# Altium PCB roverSwitch.PcbDoc (part 1 of 3)
Units mm, origin at the board's own origin, x right, y up, seen from the top; angles counter-clockwise.
Board outline 100 x 80 mm, 4 copper layers (Top Layer, Int1 (GND), Int2 (PWR), Bottom Layer), stack 1.585 mm thick; 262 components, 196 nets, 913 pads, 409 vias.
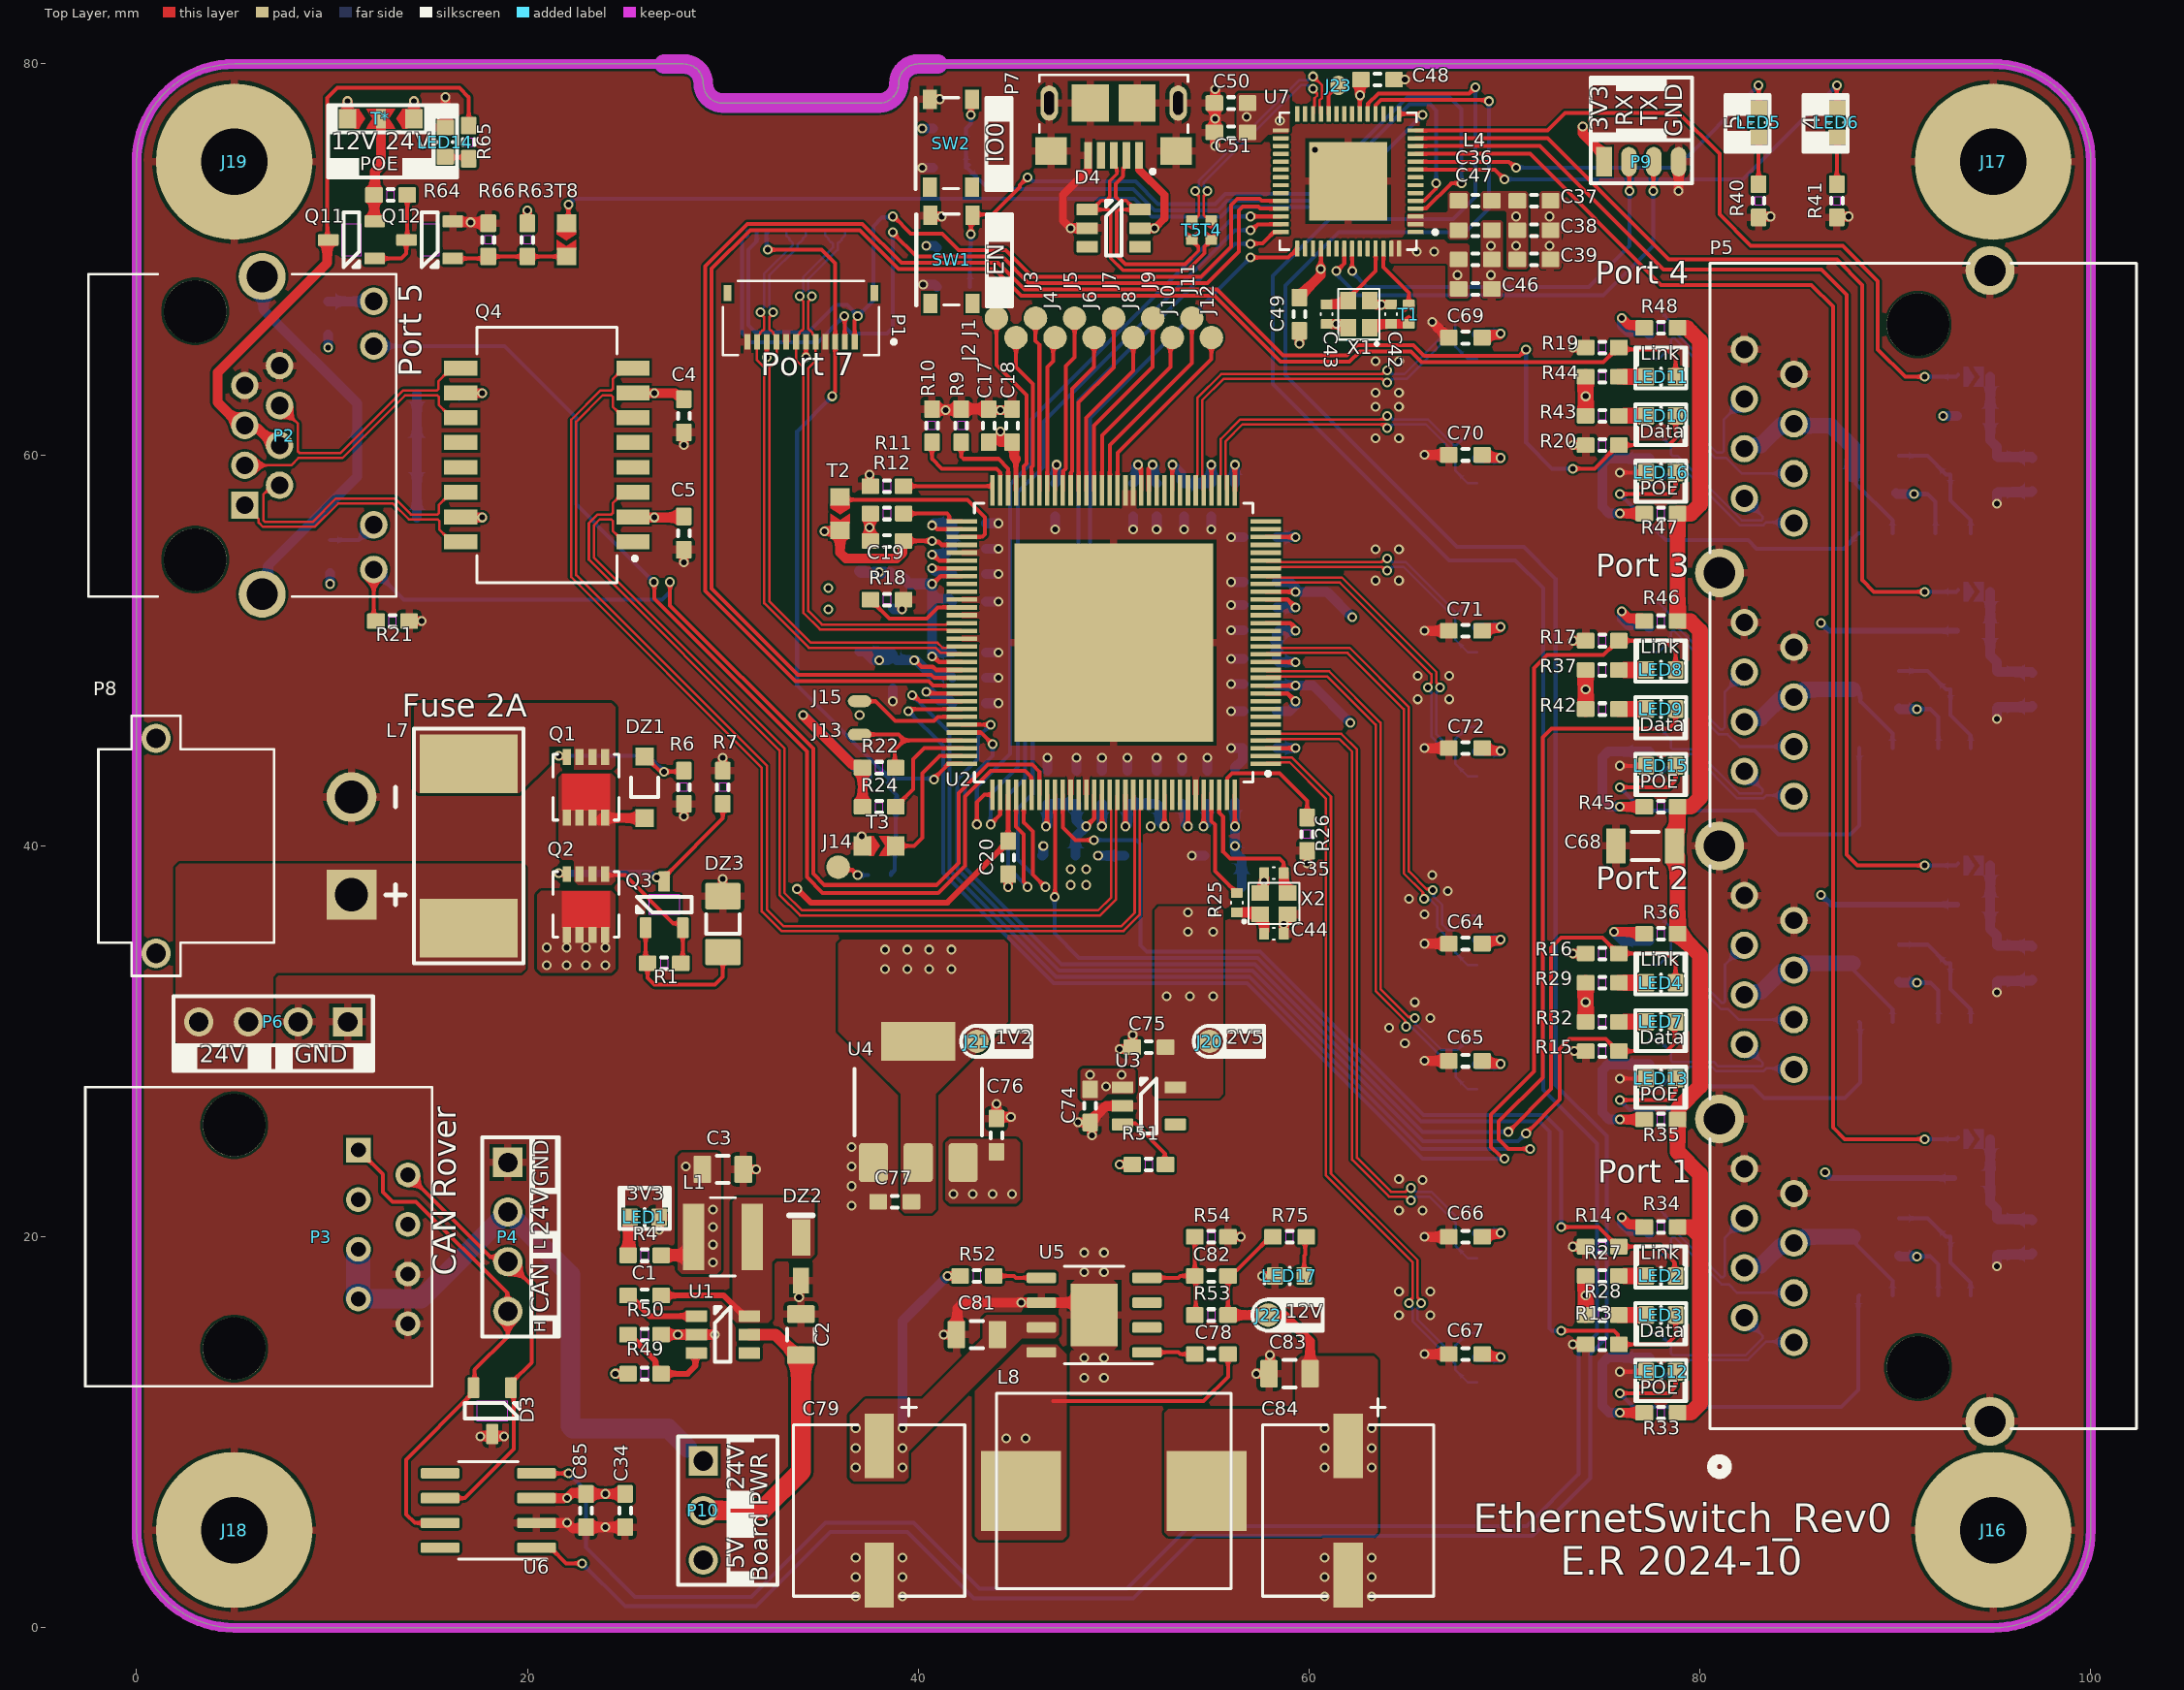
[diagram p0: Top Layer view]
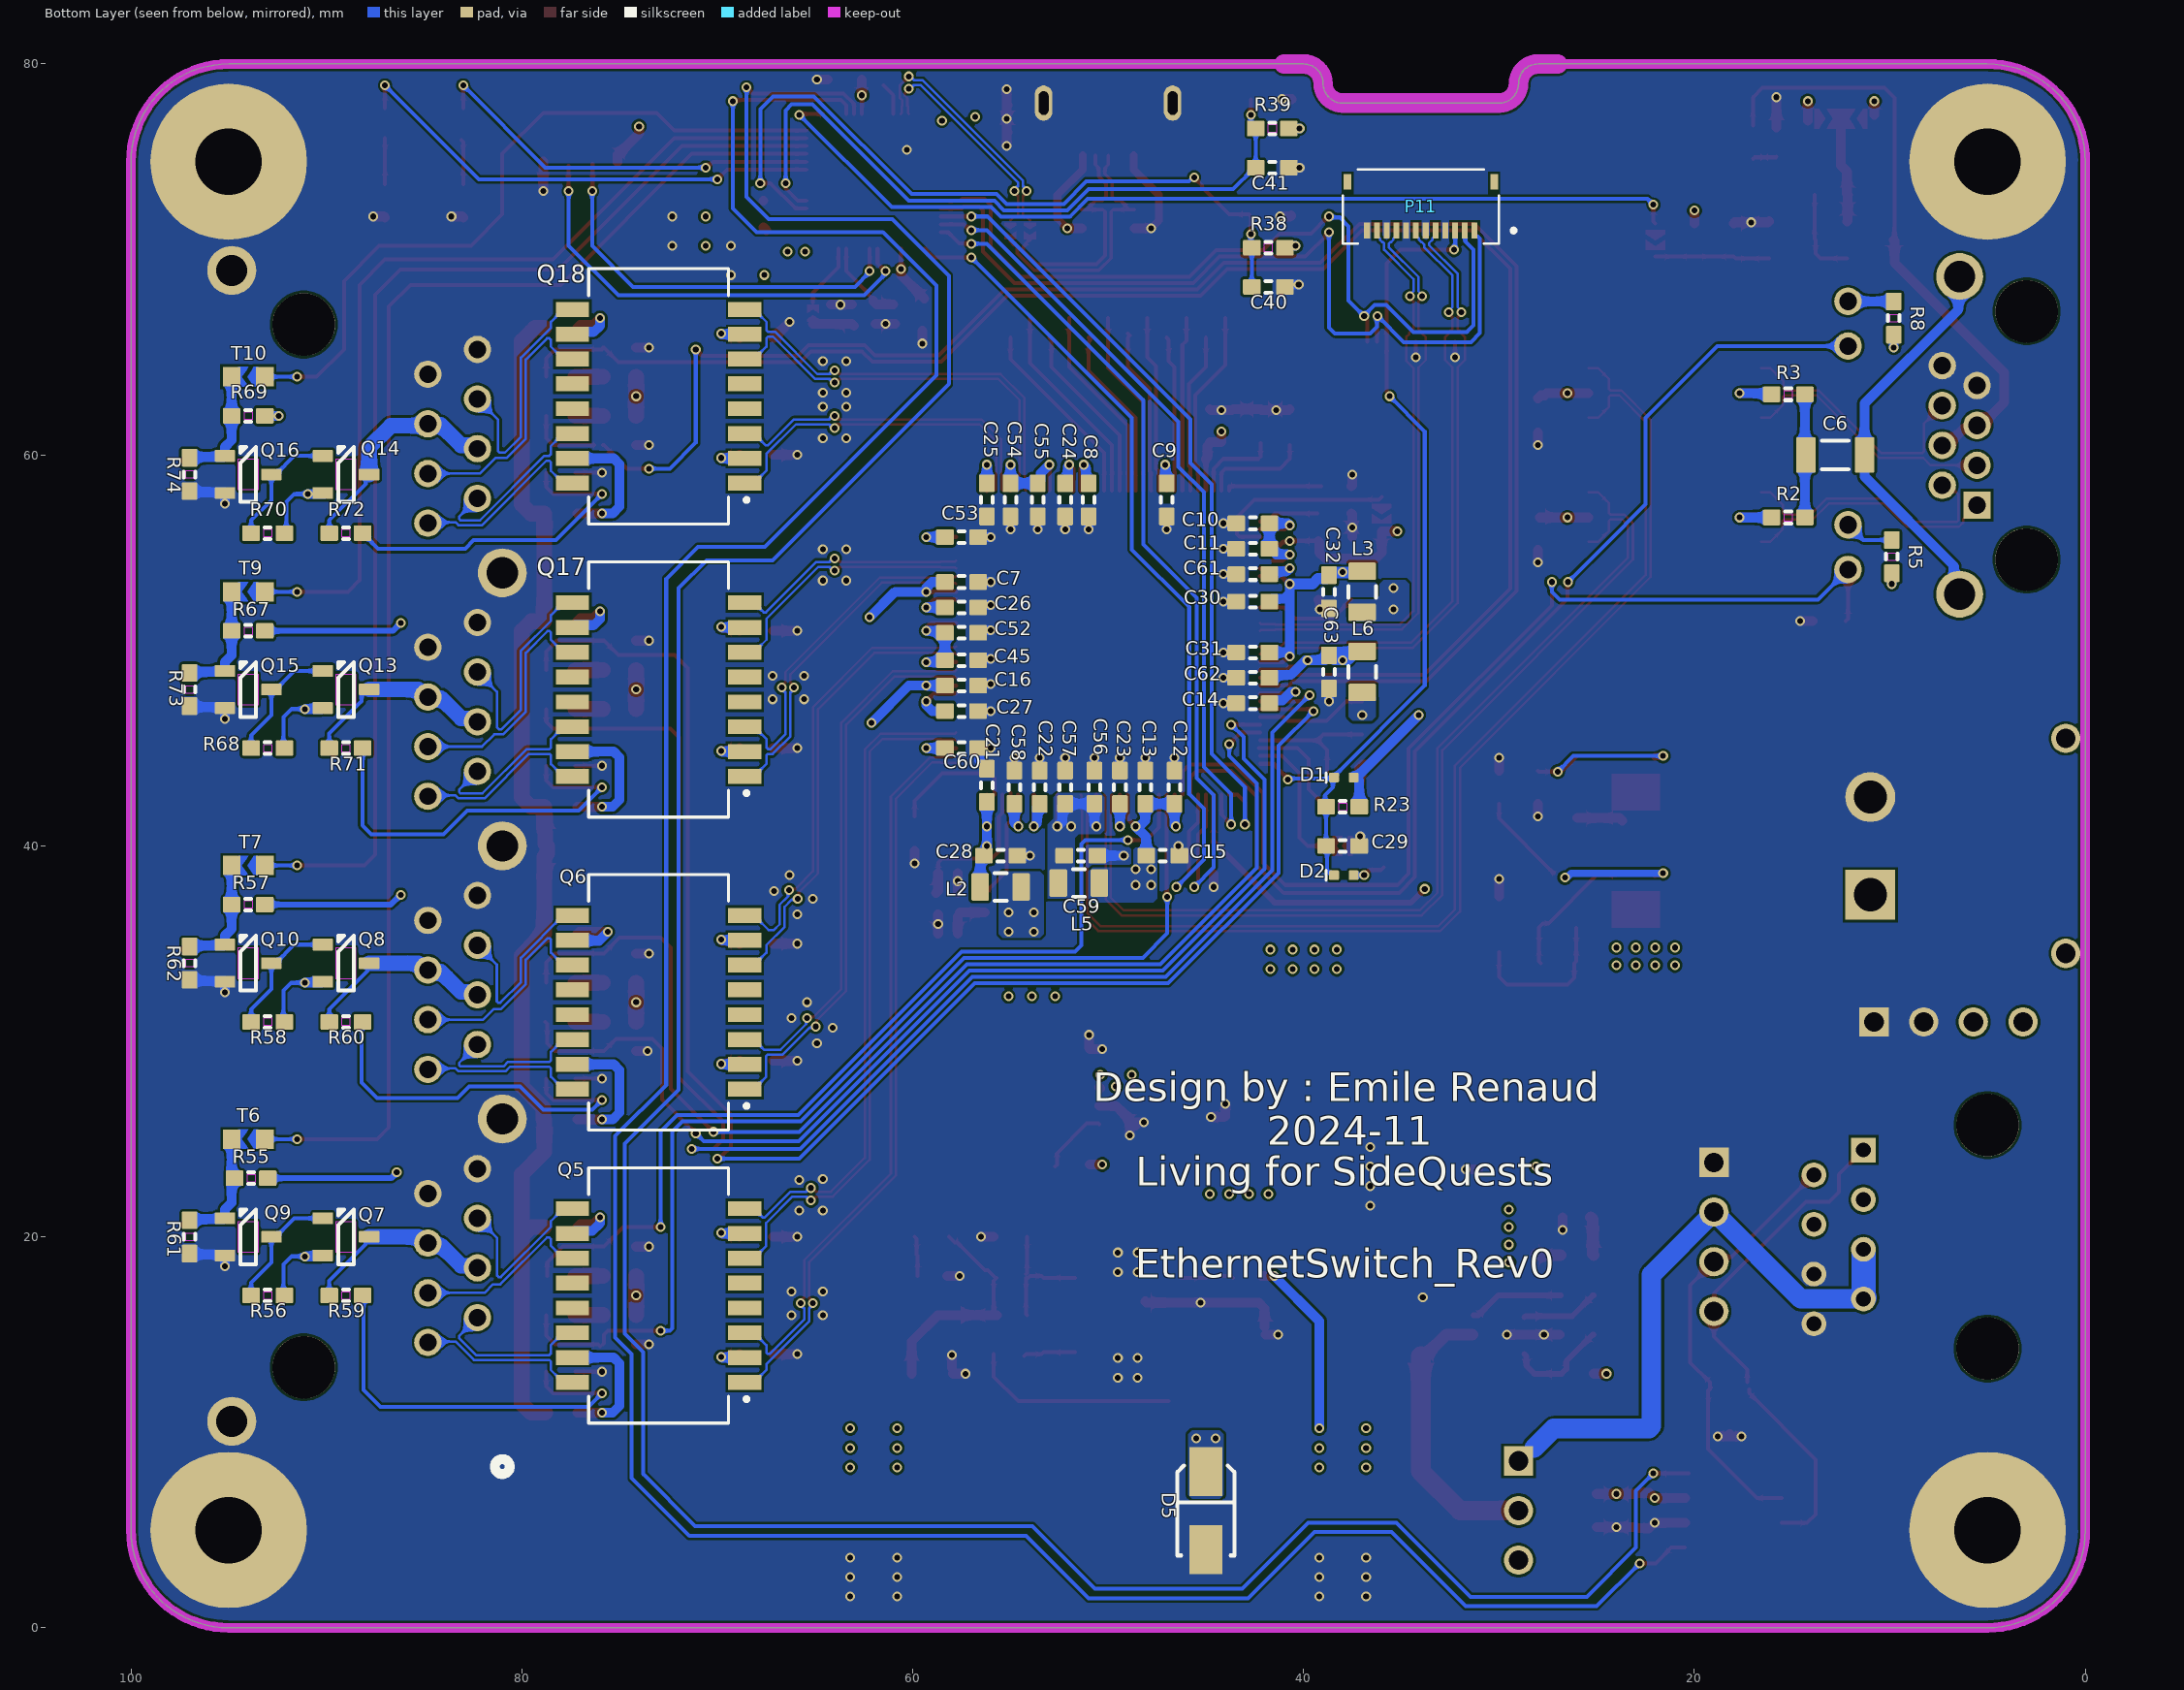
[diagram p1: Bottom Layer view, seen from below]
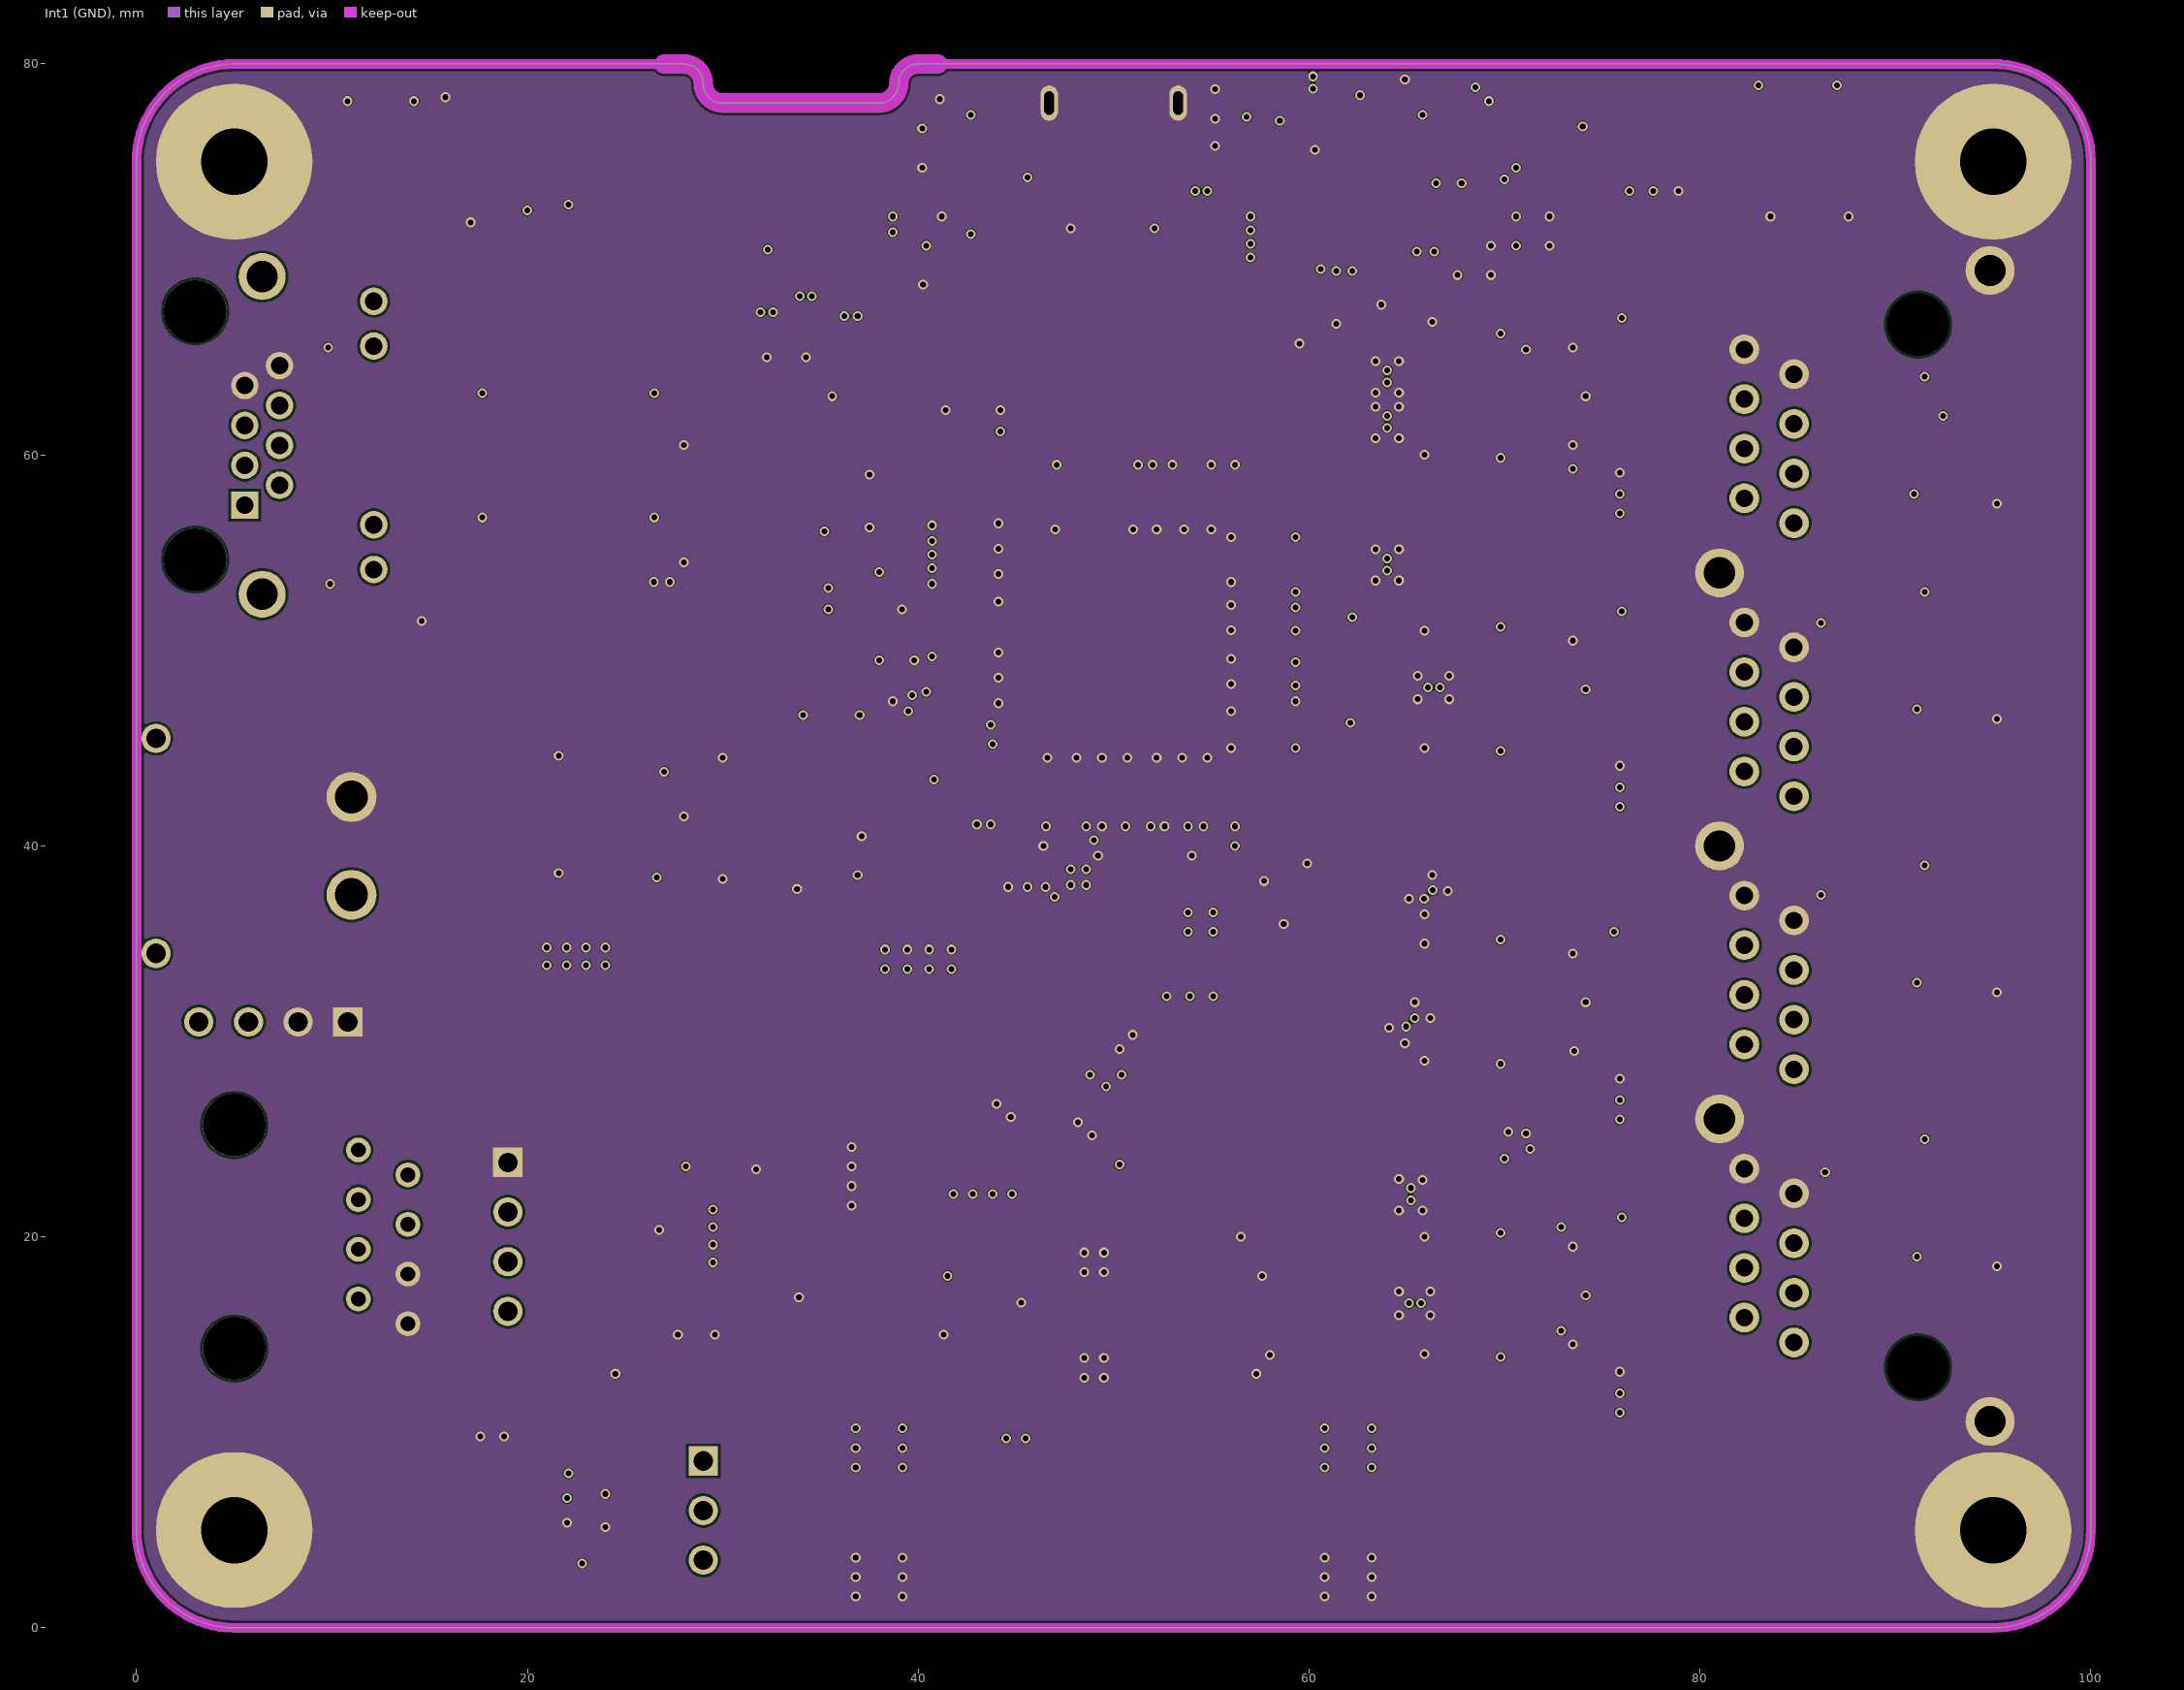
[diagram p2: Int1 (GND)]
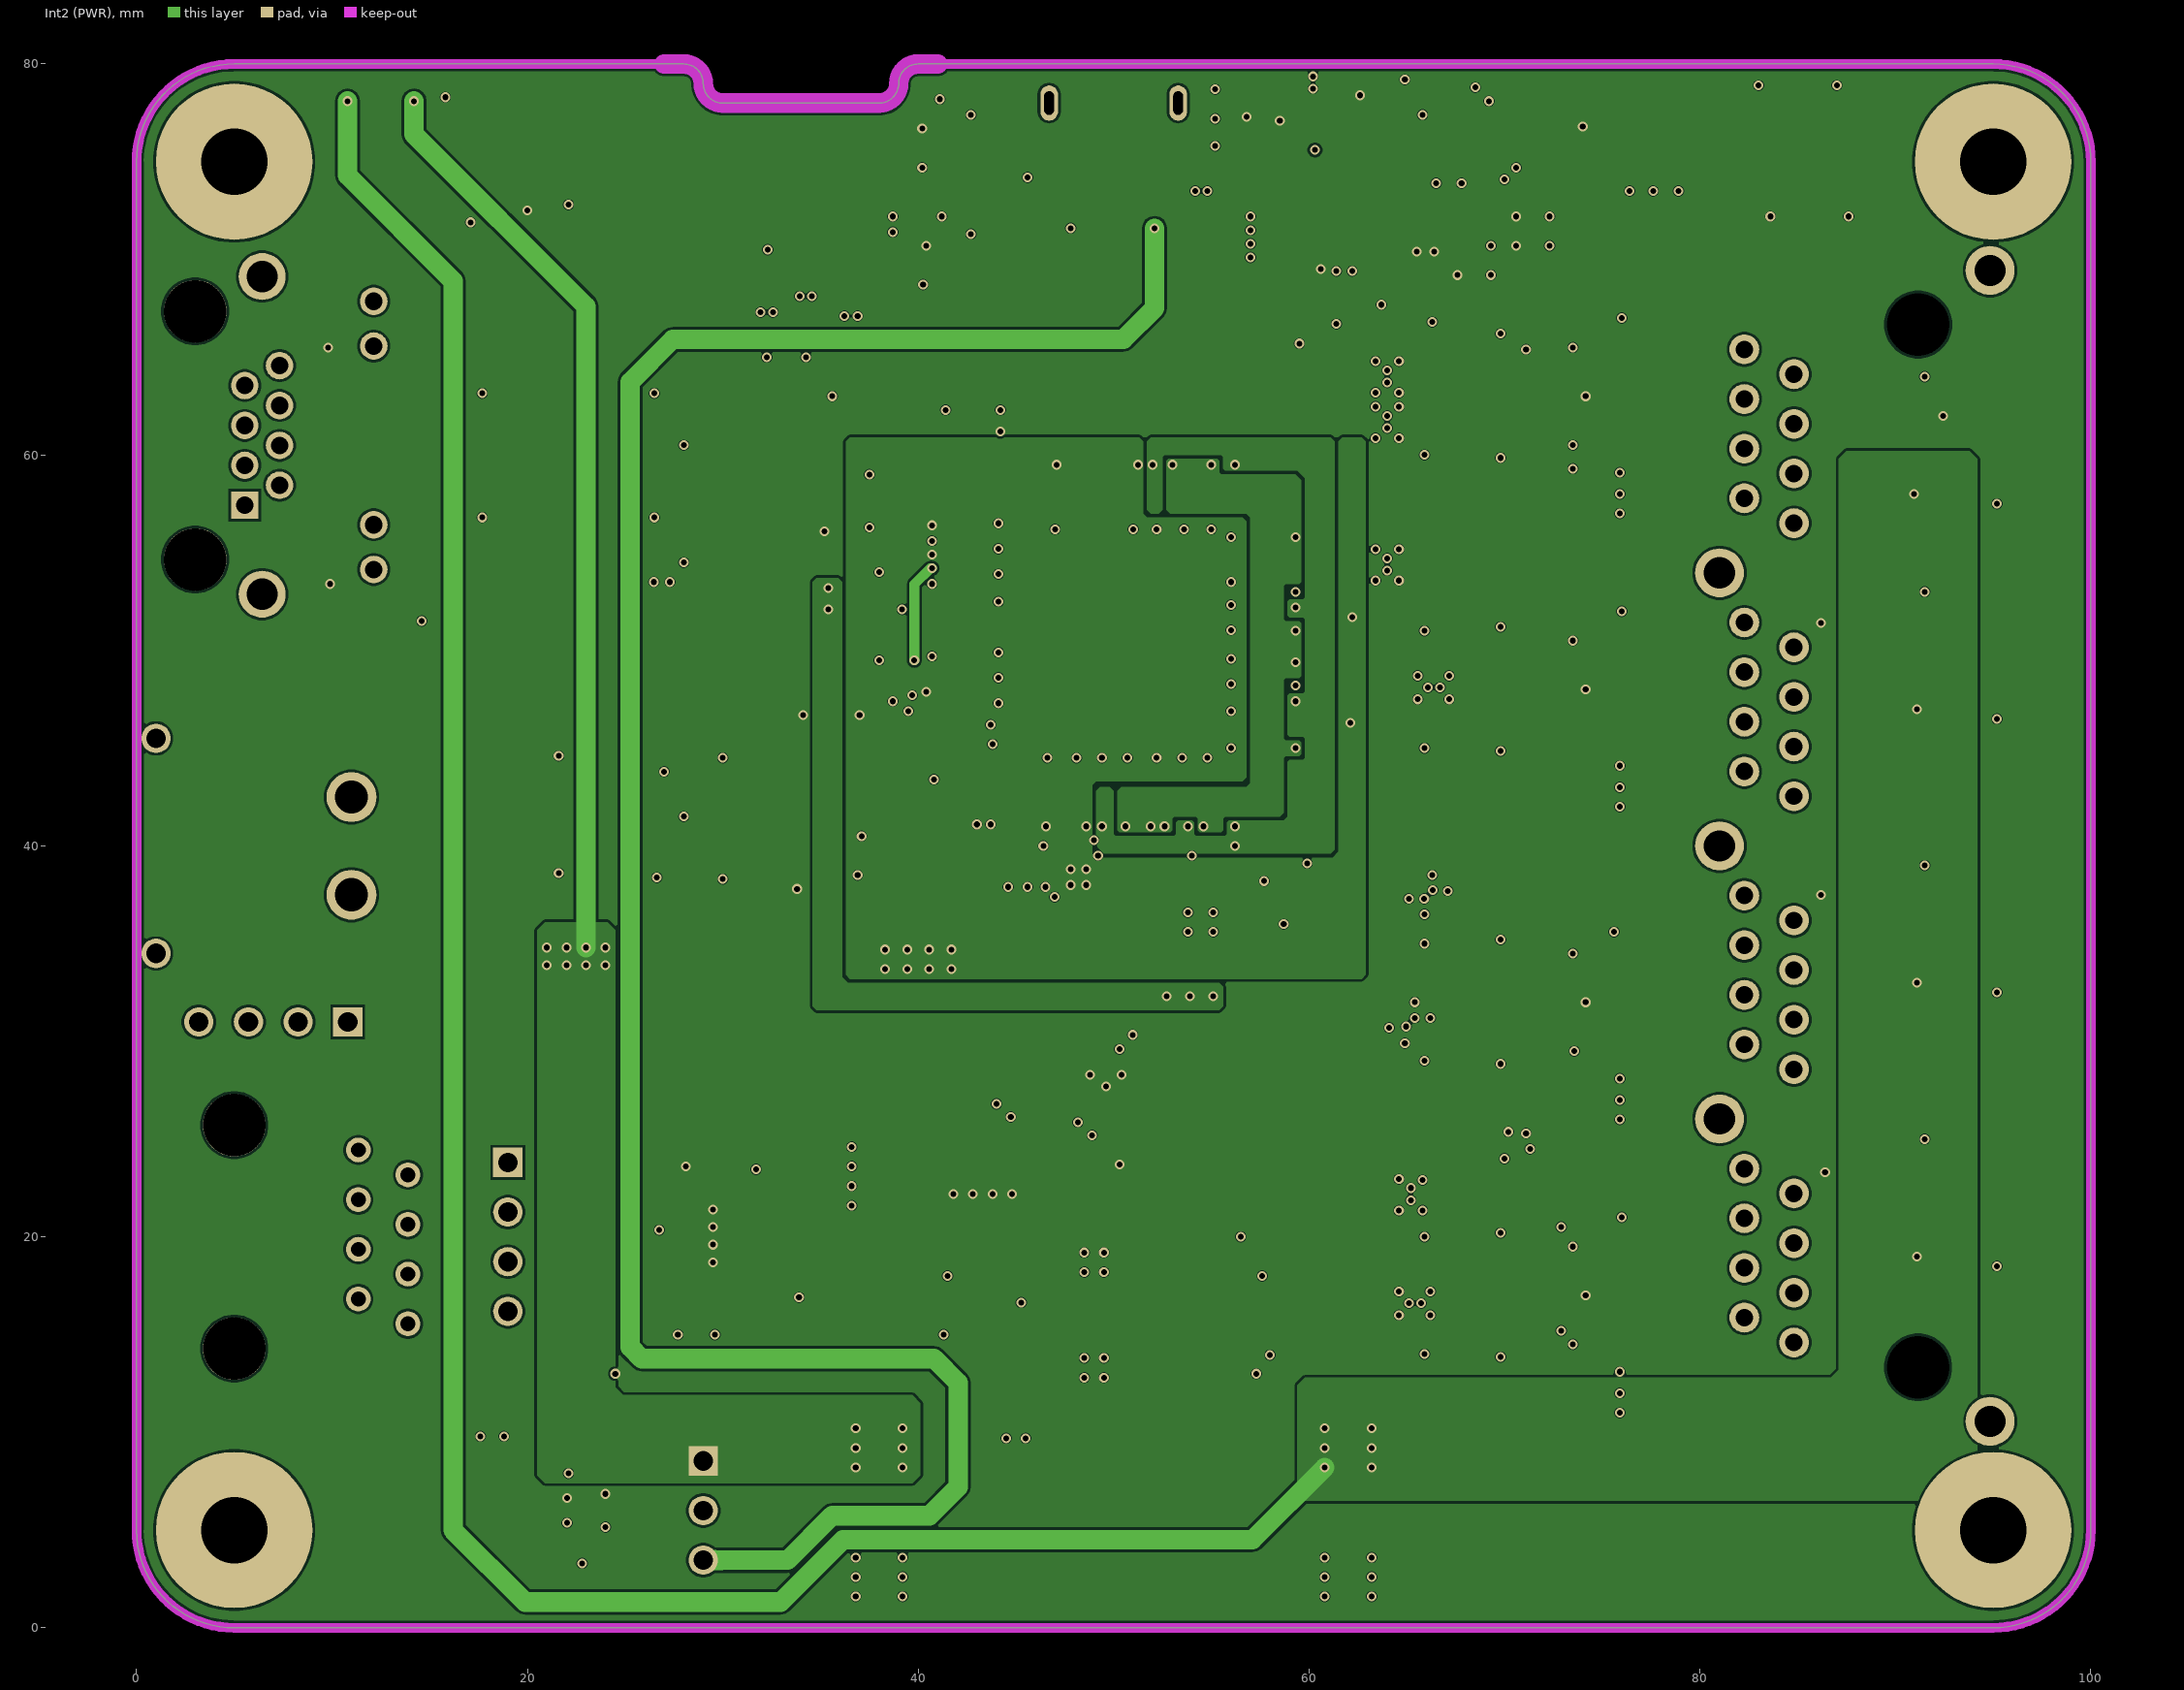
[diagram p3: Int2 (PWR)]
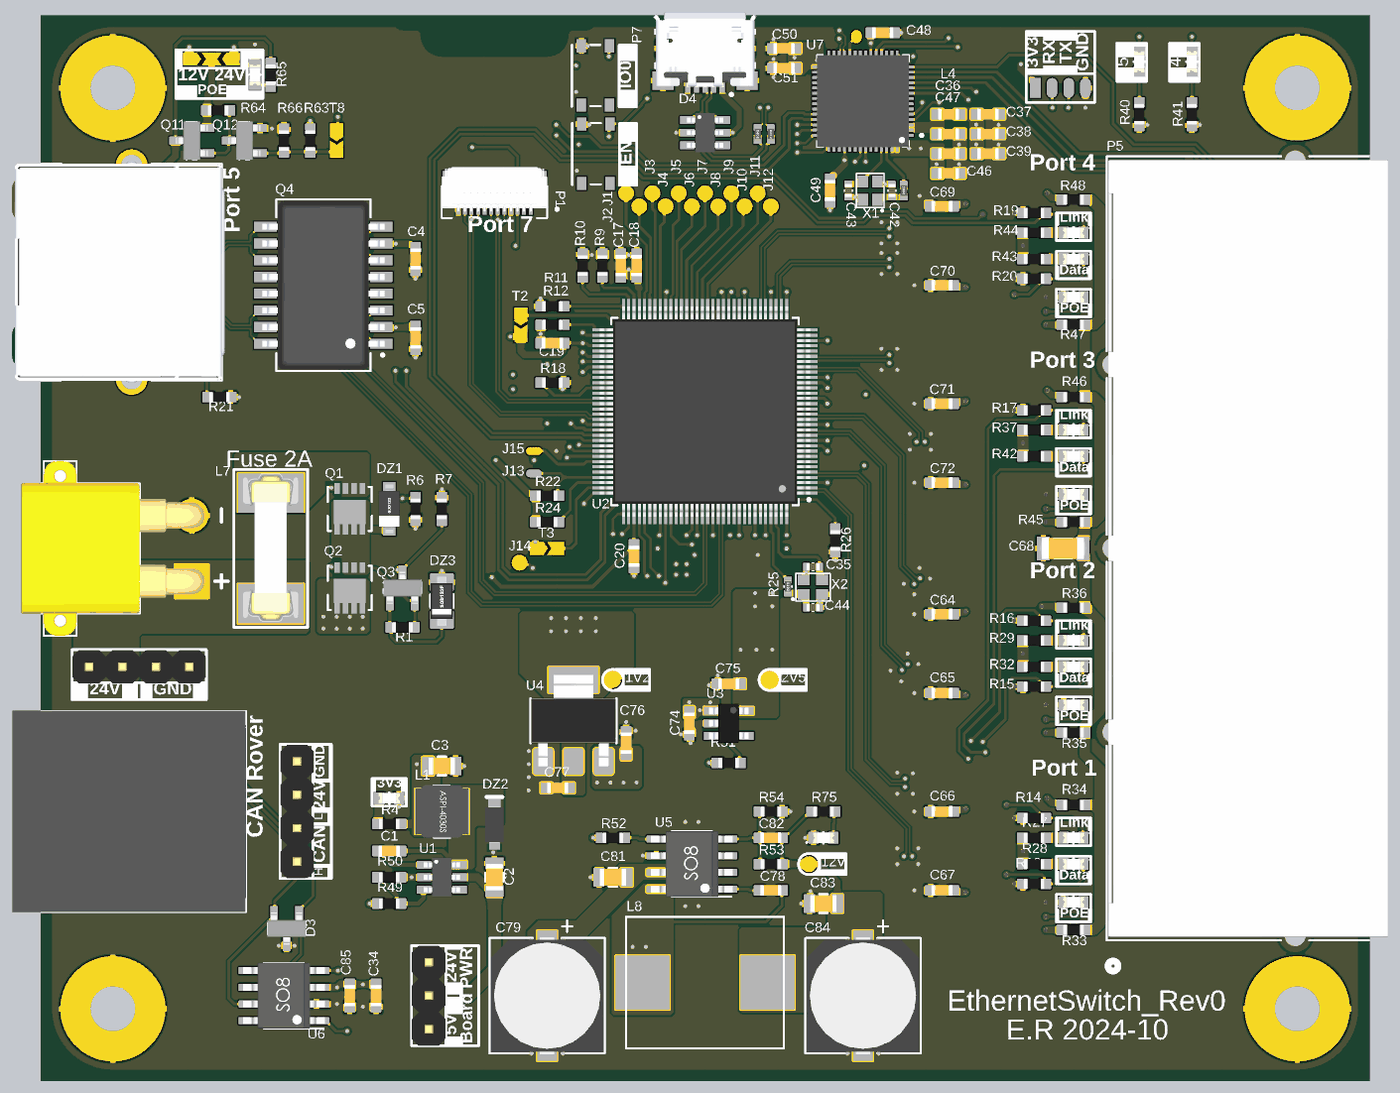
[diagram p6: 3D render of the assembled board from above, using the file's embedded part models]
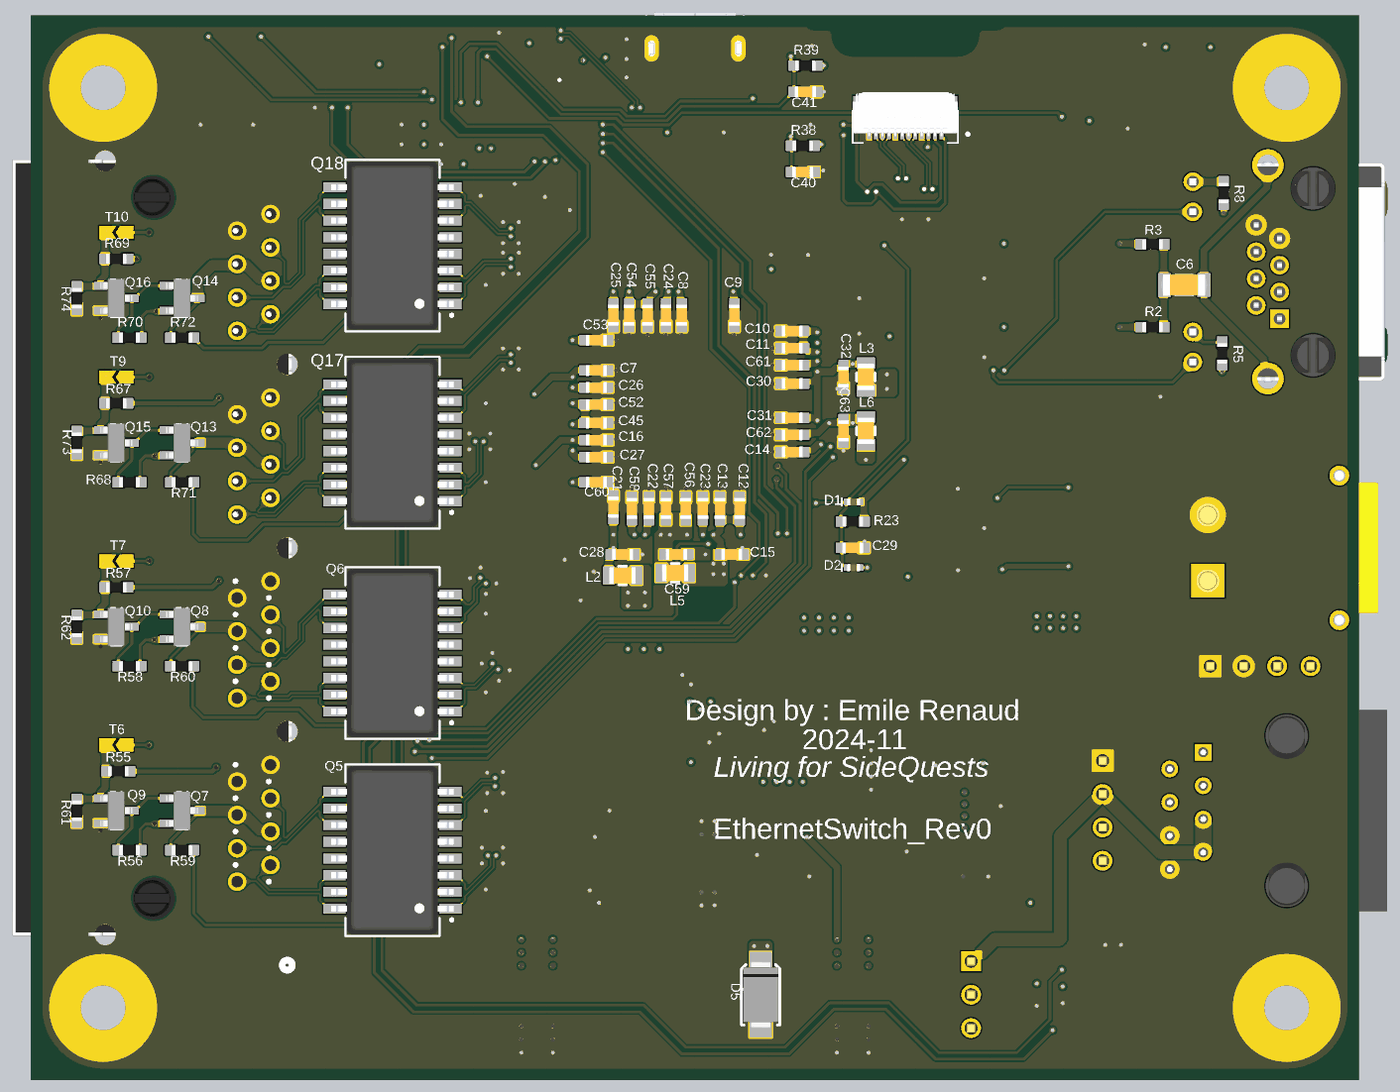
[diagram p7: 3D render of the assembled board from below, using the file's embedded part models]

## Layer stack, top to bottom
Top Solder: solder mask 0.035, SM-001, Dk 4
Top Layer: signal copper 0.035
Dielectric 2: prepreg 0.21, PP-017, Dk 4.6
Int1 (GND): signal copper 0.015
Dielectric 3: core 1.065, Core-039, Dk 4.6
Int2 (PWR): signal copper 0.015
Dielectric 4: prepreg 0.21, PP-017, Dk 4.6
Bottom Layer: signal copper 0.035
Bottom Solder: solder mask 0.035, SM-001, Dk 4

## Board outline
0,5 0,75 cw(c5,75) 5,80 28,80 cw(c28,79) 29,79 ccw(c30,79) 30,78 38,78 ccw(c38,79) 39,79 cw(c40,79) 40,80 95,80 cw(c95,75) 100,75 100,5 cw(c95,5) 95,0 5,0 cw(c5,5)

## Design rules (kind name [scope] priority, off if disabled: settings)
Clearance Clearance_Power [InNetClass('Power')] p1: gap=0.127 ignorepadtopadclearanceinfootprint=FALSE
Clearance Clearance_signal [All] p2: gap=0.125 ignorepadtopadclearanceinfootprint=FALSE
ComponentClearance [All] p1 off: gap=0.254 collisioncheckmode=3 verticalgap=0.254 showdistances=FALSE
DiffPairsRouting eth_100 [Not InDifferentialPair('USB')] p1: maxlimit=0.254 minlimit=0.127 mostfreqgap=0.254 toplayer_maxgap=0.127 toplayer_prefgap=0.127 toplayer_minwidth=0.125 toplayer_maxwidth=0.125 toplayer_prefwidth=0.125 bottomlayer_maxgap=0.127 bottomlayer_prefgap=0.127 bottomlayer_minwidth=0.125 bottomlayer_maxwidth=0.125 bottomlayer_prefwidth=0.125 impedanceprofiledriven=TRUE impedanceprofileid={BED762A8-9934-435E-9BAB-1C0AACEE0ECA} impedanceprofilevalue=100.000000 maxuncoupledlength=12.7
DiffPairsRouting USB_diff [InDifferentialPair('USB') or InDifferentialPair('USB_ESP')] p2: maxlimit=0.254 minlimit=0.127 mostfreqgap=0.254 toplayer_maxgap=0.127 toplayer_prefgap=0.127 toplayer_minwidth=0.182 toplayer_maxwidth=0.182 toplayer_prefwidth=0.182 bottomlayer_maxgap=0.127 bottomlayer_prefgap=0.127 bottomlayer_minwidth=0.182 bottomlayer_maxwidth=0.182 bottomlayer_prefwidth=0.182 impedanceprofiledriven=TRUE impedanceprofileid={FA6609CF-BA32-4F74-B84B-CE5609EF71AF} impedanceprofilevalue=90.000000 maxuncoupledlength=12.7
HoleSize [All] p1 off: absolutevalues=TRUE maxlimit=2.54 minlimit=0.025 maxpercent=80.000 minpercent=20.000
MinimumSolderMaskSliver [All] p1 off: minsoldermaskwidth=0.254
PasteMaskExpansion [All] p1 off: expansion=0
PolygonConnect PolygonConnect_Power [InNetClass('Power')] p1: connectstyle=Direct reliefconductorwidth=0.254 reliefentries=4 polygonreliefangle="90 Angle" airgapwidth=0.254
PolygonConnect PolygonConnectGND [All vs InNet('GND') AND IsNamedPolygon('GND_L01_Plane')] p2: thpad.connectstyle=Relief thpad.reliefconductorwidth=0.4 thpad.reliefentries=4 thpad.polygonreliefangle="90 Angle" thpad.airgapwidth=0.18 smdpad.connectstyle=Relief smdpad.reliefconductorwidth=0.4 smdpad.reliefentries=4 smdpad.polygonreliefangle="90 Angle" smdpad.airgapwidth=0.18 via.connectstyle=Direct via.reliefconductorwidth=0.254 via.reliefentries=4 via.polygonreliefangle="90 Angle" via.airgapwidth=0.254
PolygonConnect [All] p3: connectstyle=Direct reliefconductorwidth=0.254 reliefentries=4 polygonreliefangle="90 Angle" airgapwidth=0.254
RoutingVias [All] p1: holewidth=0.3 width=0.5 viastyle="Through Hole" minholewidth=0.15 minwidth=0.25 maxholewidth=1 maxwidth=1.3
SilkToSolderMaskClearance [IsPad] p1 off: minsilkscreentomaskgap=0.254 clearancetoexposedcopper=TRUE
SolderMaskExpansion [All] p1 off: expansion=0.102 istentingtop=FALSE
SolderMaskExpansion SolderMaskExpansion_1 [All] p2: expansion=0.102 istentingtop=FALSE
SupplyNets "Schematic Supply Nets_13" [InNet('2V5')] p1: voltage=0.000
SupplyNets "Schematic Supply Nets_12" [InNet('3V3')] p2: voltage=0.000
SupplyNets "Schematic Supply Nets_11" [InNet('AVDDH')] p3: voltage=0.000
SupplyNets "Schematic Supply Nets_10" [InNet('1V2')] p4: voltage=0.000
SupplyNets "Schematic Supply Nets_9" [InNet('5V_USB')] p5: voltage=0.000
SupplyNets "Schematic Supply Nets_8" [InNet('GND_RJ45')] p6: voltage=0.000
SupplyNets "Schematic Supply Nets_7" [InNet('12V')] p7: voltage=0.000
SupplyNets "Schematic Supply Nets_6" [InNet('GND')] p8: voltage=0.000
SupplyNets "Schematic Supply Nets_5" [InNet('GND_CH')] p9: voltage=0.000
SupplyNets "Schematic Supply Nets_4" [InNet('VDDHS')] p10: voltage=0.000
SupplyNets "Schematic Supply Nets_3" [InNet('24V')] p11: voltage=0.000
SupplyNets "Schematic Supply Nets_2" [InNet('GND_RJ45_2')] p12: voltage=0.000
SupplyNets "Schematic Supply Nets_1" [InNet('AVDDL')] p13: voltage=0.000
SupplyNets "Schematic Supply Nets" [InNet('VDDLS')] p14: voltage=0.000
Width Width_Power(5A) [InNetClass('Power')] p1: maxlimit=2 minlimit=0.2 preferedwidth=1.25
Width Width_signal [All] p2: maxlimit=1 minlimit=0.1 preferedwidth=0.2 minimp=50.000000 maximp=50.000000 favimp=50.000000
24 further rules are at their usual default settings.

## Classes and differential pairs
differential pair class USB: USB USB_ESP
net class MDI_DIFF100: ETH_RX_1_N ETH_RX_1_P ETH_RX_2_N ETH_RX_2_P ETH_RX_3_N ETH_RX_3_P ETH_RX_4_N ETH_RX_4_P ETH_RX_5_N ETH_RX_5_P ETH_TX_1_N ETH_TX_1_P ETH_TX_2_N ETH_TX_2_P ETH_TX_3_N ETH_TX_3_P ETH_TX_4_N ETH_TX_4_P ETH_TX_5_N ETH_TX_5_P PHY_RX_1_N PHY_RX_1_P PHY_RX_2_N PHY_RX_2_P PHY_RX_3_N PHY_RX_3_P PHY_RX_4_N PHY_RX_4_P PHY_TX_1_N PHY_TX_1_P PHY_TX_2_N PHY_TX_2_P PHY_TX_3_N PHY_TX_3_P PHY_TX_4_N PHY_TX_4_P
component class Power: C1 C2 C3 C74 C75 C76 C77 C78 C79 C81 C82 C83 C84 D5 DZ1 DZ2 DZ3 J20 J21 J22 L1 L7 L8 LED1 LED17 P6 P8 P10 Q1 Q2 Q3 R1 R4 R6 R7 R49 R50 R51 R52 R53 R54 R75 U1 U3 U4 U5
component class KSZ_Switch: J1 J2 J3 J4 J5 J6 J7 J8 J9 J10 J11 J12 R9 R10 R11 R12 R13 R14 R15 R16 R17 R18 R19 R20 R21 U2
component class KSZ_Switch_Control: C7 C8 C9 C10 C11 C12 C13 C14 C15 C16 C17 C18 C19 C20 C21 C22 C23 C24 C25 C26 C27 C28 C29 C30 C31 C32 C35 C44 C45 C52 C53 C54 C55 C56 C57 C58 C59 C60 C61 C62 C63 D1 D2 J13 J14 J15 L2 L3 L5 L6 R22 R23 R24 R25 R26 T2 T3 X2
component class ESP32: C36 C37 C38 C39 C40 C41 C42 C43 C46 C47 C48 C49 C50 C51 D4 J23 L4 LED5 LED6 P7 P9 R38 R39 R40 R41 SW1 SW2 T1 T4 T5 U7 X1
component class Connectors_2: C4 C5 C6 P1 P2 P3 P4 P11 Q4 R2 R3 R5 R8
component class Connectors_1: C64 C65 C66 C67 C68 C69 C70 C71 C72 LED2 LED3 LED4 LED7 LED8 LED9 LED10 LED11 P5 Q5 Q6 Q17 Q18 R27 R28 R29 R32 R33 R34 R35 R36 R37 R42 R43 R44 R45 R46 R47 R48
component class CAN-SW: C34 C85 D3 J16 J17 J18 J19 LED12 LED13 LED14 LED15 LED16 Q7 Q8 Q9 Q10 Q11 Q12 Q13 Q14 Q15 Q16 R55 R56 R57 R58 R59 R60 R61 R62 R63 R64 R65 R66 R67 R68 R69 R70 R71 R72 R73 R74 T6 T7 T8 T9 T10 T* U6
net class Power: 3V3 24V 24V_RAW NetC1_2 NetDZ1_2 NetL7_2
differential pair USB_ESP: +USB_ESP_P -USB_ESP_N
differential pair USB: +USB_P -USB_N
differential pair S_TX_7: +S_TX_7_P -S_TX_7_N
differential pair S_RX_7: +S_RX_7_P -S_RX_7_N
differential pair PHY_TX_5: +PHY_TX_5_P -PHY_TX_5_N
differential pair PHY_TX_4: +PHY_TX_4_P -PHY_TX_4_N
differential pair PHY_TX_3: +PHY_TX_3_P -PHY_TX_3_N
differential pair PHY_TX_2: +PHY_TX_2_P -PHY_TX_2_N
differential pair PHY_TX_1: +PHY_TX_1_P -PHY_TX_1_N
differential pair PHY_RX_5: +PHY_RX_5_P -PHY_RX_5_N
differential pair PHY_RX_4: +PHY_RX_4_P -PHY_RX_4_N
differential pair PHY_RX_3: +PHY_RX_3_P -PHY_RX_3_N
differential pair PHY_RX_2: +PHY_RX_2_P -PHY_RX_2_N
differential pair PHY_RX_1: +PHY_RX_1_P -PHY_RX_1_N
differential pair ETH_TX_5: +ETH_TX_5_P -ETH_TX_5_N
differential pair ETH_TX_4: +ETH_TX_4_P -ETH_TX_4_N
differential pair ETH_TX_3: +ETH_TX_3_P -ETH_TX_3_N
differential pair ETH_TX_2: +ETH_TX_2_P -ETH_TX_2_N
differential pair ETH_TX_1: +ETH_TX_1_P -ETH_TX_1_N
differential pair ETH_RX_5: +ETH_RX_5_P -ETH_RX_5_N
differential pair ETH_RX_4: +ETH_RX_4_P -ETH_RX_4_N
differential pair ETH_RX_3: +ETH_RX_3_P -ETH_RX_3_N
differential pair ETH_RX_2: +ETH_RX_2_P -ETH_RX_2_N
differential pair ETH_RX_1: +ETH_RX_1_P -ETH_RX_1_N

## Components (designator, comment, footprint, x,y, rotation, side; value= is the part's Value field where it differs from the comment)
C1 "Capacitor-0603-10nF-25V-X5R" CAPACITOR-0603 26,17 r0 top value=10nF
C2 "Capacitor-0805-10uF-35V-X5R" CAPACITOR-0805 34,15 r270 top value=10uF
C3 "Capacitor-0805-22uF-16V-X5R" CAPACITOR-0805 30,23.455 r180 top value=22uF
C4 "Capacitor-0603-0.1uF-50V-X7R" CAPACITOR-0603 28,62 r90 top value=0.1uF
C5 "Capacitor-0603-0.1uF-50V-X7R" CAPACITOR-0603 28,56 r90 top value=0.1uF
C6 "Capacitor-1206-1nF-2kV-X7R" CAPACITOR-1206 12.8,60 r180 bottom value=1nF
C7 "Capacitor-0603-0.1uF-50V-X7R" CAPACITOR-0603 57.5,53.5 r0 bottom value=0.1uF
C8 "Capacitor-0603-0.1uF-50V-X7R" CAPACITOR-0603 51,57.7 r90 bottom value=0.1uF
C9 "Capacitor-0603-0.1uF-50V-X7R" CAPACITOR-0603 47,57.7 r90 bottom value=0.1uF
C10 "Capacitor-0603-0.1uF-50V-X7R" CAPACITOR-0603 42.6,56.5 r180 bottom value=0.1uF
C11 "Capacitor-0603-0.1uF-50V-X7R" CAPACITOR-0603 42.6,55.2 r180 bottom value=0.1uF
C12 "Capacitor-0603-0.1uF-50V-X7R" CAPACITOR-0603 46.6,43 r270 bottom value=0.1uF
C13 "Capacitor-0603-0.1uF-50V-X7R" CAPACITOR-0603 48.1,43 r270 bottom value=0.1uF
C14 "Capacitor-0603-0.1uF-50V-X7R" CAPACITOR-0603 42.6,47.3 r180 bottom value=0.1uF
C15 "Capacitor-0603-0.1uF-50V-X7R" CAPACITOR-0603 47.2,39.5 r0 bottom value=0.1uF
C16 "Capacitor-0603-22uF-10V-X5R" CAPACITOR-0603 57.5,48.2 r0 bottom value=22uF
C17 "Capacitor-0603-10uF-10V-X5R" CAPACITOR-0603 43.6,61.5 r270 top value=10uF
C18 "Capacitor-0603-0.1uF-50V-X7R" CAPACITOR-0603 44.8,61.5 r270 top value=0.1uF
C19 "Capacitor-0603-0.1uF-50V-X7R" CAPACITOR-0603 38.4,55.6 r0 top value=0.1uF
C20 "Capacitor-0603-0.1uF-50V-X7R" CAPACITOR-0603 44.6,39.4 r90 top value=0.1uF
C21 "Capacitor-0603-0.1uF-50V-X7R" CAPACITOR-0603 56.2,43.1 r270 bottom value=0.1uF
C22 "Capacitor-0603-0.1uF-50V-X7R" CAPACITOR-0603 53.5,43 r270 bottom value=0.1uF
C23 "Capacitor-0603-0.1uF-50V-X7R" CAPACITOR-0603 49.4,43 r270 bottom value=0.1uF
C24 "Capacitor-0603-0.1uF-50V-X7R" CAPACITOR-0603 52.2,57.7 r90 bottom value=0.1uF
C25 "Capacitor-0603-0.1uF-50V-X7R" CAPACITOR-0603 56.2,57.7 r90 bottom value=0.1uF
C26 "Capacitor-0603-0.1uF-50V-X7R" CAPACITOR-0603 57.5,52.2 r0 bottom value=0.1uF
C27 "Capacitor-0603-0.1uF-50V-X7R" CAPACITOR-0603 57.5,46.9 r0 bottom value=0.1uF
C28 "Capacitor-0603-22uF-10V-X5R" CAPACITOR-0603 55.5,39.5 r0 bottom value=22uF
C29 "Capacitor-0603-10uF-10V-X5R" CAPACITOR-0603 38,40 r0 bottom value=10uF
C30 "Capacitor-0603-22uF-10V-X5R" CAPACITOR-0603 42.6,52.5 r180 bottom value=22uF
C31 "Capacitor-0603-0.1uF-50V-X7R" CAPACITOR-0603 42.6,49.9 r180 bottom value=0.1uF
C32 "Capacitor-0603-0.1uF-50V-X7R" CAPACITOR-0603 38.7,53 r90 bottom value=0.1uF
C34 "Capacitor-0603-0.1uF-50V-X7R" CAPACITOR-0603 25,6 r90 top value=0.1uF
C35 "Capacitor-0402-10pF-50V-C0G" CAPACITOR-0402 58.2,38.6 r0 top value=10pF
C36 "Capacitor-0603-0.1uF-50V-X7R" CAPACITOR-0603 68.5,71.5 r180 top value=0.1uF
C37 "Capacitor-0603-0.1uF-50V-X7R" CAPACITOR-0603 71.5,73 r180 top value=0.1uF
C38 "Capacitor-0603-1uF-25V-X5R" CAPACITOR-0603 71.5,71.5 r180 top value=1uF
C39 "Capacitor-0603-10uF-6.3V-X5R" CAPACITOR-0603 71.5,70 r180 top value=10uF
C40 "Capacitor-0603-1uF-25V-X5R" CAPACITOR-0603 41.8,68.6 r0 bottom value=1uF
C41 "Capacitor-0603-0.1uF-50V-X7R" CAPACITOR-0603 41.6,74.7 r0 bottom value=0.1uF
C42 "Capacitor-0402-10pF-50V-C0G" CAPACITOR-0402 64.2,67.2 r270 top value=10pF
C43 "Capacitor-0402-10pF-50V-C0G" CAPACITOR-0402 60.9,67.2 r90 top value=10pF
C44 "Capacitor-0402-10pF-50V-C0G" CAPACITOR-0402 58.2,35.5 r180 top value=10pF
C45 "Capacitor-0603-0.1uF-50V-X7R" CAPACITOR-0603 57.5,49.5 r0 bottom value=0.1uF
C46 "Capacitor-0603-10nF-25V-X5R" CAPACITOR-0603 68.5,68.5 r180 top value=10nF
C47 "Capacitor-0603-1uF-25V-X5R" CAPACITOR-0603 68.5,70 r180 top value=1uF
C48 "Capacitor-0603-0.1uF-50V-X7R" CAPACITOR-0603 63.5,79.2 r180 top value=0.1uF
C49 "Capacitor-0603-0.1uF-50V-X7R" CAPACITOR-0603 59.5,67.2 r90 top value=0.1uF
C50 "Capacitor-0603-0.1uF-50V-X7R" CAPACITOR-0603 56,78 r0 top value=0.1uF
C51 "Capacitor-0603-1uF-25V-X5R" CAPACITOR-0603 56,76.5 r0 top value=1uF
C52 "Capacitor-0603-0.1uF-50V-X7R" CAPACITOR-0603 57.5,50.9 r0 bottom value=0.1uF
C53 "Capacitor-0603-0.1uF-50V-X7R" CAPACITOR-0603 57.5,55.8 r0 bottom value=0.1uF
C54 "Capacitor-0603-0.1uF-50V-X7R" CAPACITOR-0603 55,57.7 r90 bottom value=0.1uF
C55 "Capacitor-0603-0.1uF-50V-X7R" CAPACITOR-0603 53.6,57.7 r90 bottom value=0.1uF
C56 "Capacitor-0603-0.1uF-50V-X7R" CAPACITOR-0603 50.7,43 r270 bottom value=0.1uF
C57 "Capacitor-0603-0.1uF-50V-X7R" CAPACITOR-0603 52.2,43 r270 bottom value=0.1uF
C58 "Capacitor-0603-0.1uF-50V-X7R" CAPACITOR-0603 54.8,43 r270 bottom value=0.1uF
C59 "Capacitor-0603-0.1uF-50V-X7R" CAPACITOR-0603 51.4,39.5 r0 bottom value=0.1uF
C60 "Capacitor-0603-22uF-10V-X5R" CAPACITOR-0603 57.5,45 r0 bottom value=22uF
C61 "Capacitor-0603-22uF-10V-X5R" CAPACITOR-0603 42.6,53.9 r180 bottom value=22uF
C62 "Capacitor-0603-0.1uF-50V-X7R" CAPACITOR-0603 42.6,48.6 r180 bottom value=0.1uF
C63 "Capacitor-0603-0.1uF-50V-X7R" CAPACITOR-0603 38.7,48.9 r90 bottom value=0.1uF
C64 "Capacitor-0603-0.1uF-50V-X7R" CAPACITOR-0603 68,35 r0 top value=0.1uF
C65 "Capacitor-0603-0.1uF-50V-X7R" CAPACITOR-0603 68,29 r0 top value=0.1uF
C66 "Capacitor-0603-0.1uF-50V-X7R" CAPACITOR-0603 68,20 r0 top value=0.1uF
C67 "Capacitor-0603-0.1uF-50V-X7R" CAPACITOR-0603 68,14 r0 top value=0.1uF
C68 "Capacitor-1206-1nF-2kV-X7R" CAPACITOR-1206 77.2,40 r180 top value=1nF
C69 "Capacitor-0603-0.1uF-50V-X7R" CAPACITOR-0603 68,66 r0 top value=0.1uF
C70 "Capacitor-0603-0.1uF-50V-X7R" CAPACITOR-0603 68,60 r0 top value=0.1uF
C71 "Capacitor-0603-0.1uF-50V-X7R" CAPACITOR-0603 68,51 r0 top value=0.1uF
C72 "Capacitor-0603-0.1uF-50V-X7R" CAPACITOR-0603 68,45 r0 top value=0.1uF
C74 "Capacitor-0603-10uF-10V-X5R" CAPACITOR-0603 48.8,26.7 r270 top value=10uF
C75 "Capacitor-0603-10uF-10V-X5R" CAPACITOR-0603 51.8,29.7 r180 top value=10uF
C76 "Capacitor-0603-1uF-25V-X5R" CAPACITOR-0603 44,25.2 r270 top value=1uF
C77 "Capacitor-0603-1uF-25V-X5R" CAPACITOR-0603 38.8,21.8 r0 top value=1uF
C78 "Capacitor-0603-10nF-50V-X7R" CAPACITOR-0603 55,14 r180 top value=10nF
C79 "CAP ALUM 100UF 20% 25V SMD" CAP_J-V_8X10P5_RUB 38,6 r270 top value=100uF
C81 "Capacitor-0805-22uF-25V-X5R" CAPACITOR-0805 43,15 r0 top value=22uF
C82 "Capacitor-0603-82pF-50V-C0G" CAPACITOR-0603 55,18 r0 top value=82pF
C83 "Capacitor-0805-22uF-25V-X5R" CAPACITOR-0805 59,13 r0 top value=22uF
C84 "CAP ALUM 220UF 20% 35V SMD" CAP_J-V_8X10P5_RUB 62,6 r270 top value=220uF
C85 "Capacitor-0603-10uF-10V-X5R" CAPACITOR-0603 23,6 r90 top value=10uF
D1 "CDBQR0130L" Diode-0402 37.938,43.5 r180 bottom
D2 "CDBQR0130L" Diode-0402 37.938,38.5 r180 bottom
D3 "ESDCAN24-2BLY" SOT-23-3 18.2,11.1 r180 top
D4 "NUP4301MR6T1G" SOT-23-6 50,71.6 r270 top
D5 "CDBA540-HF" SMA/DO-214AC 45,6 r90 bottom
DZ1 "BZT52C6V2-TP" SOD-123 26,43 r270 top
DZ2 "MSS1P3L-M3/89A" DO-219AD 34,19 r270 top
DZ3 "MMSZ5254B-TP" SOD-123F 30,36 r270 top
J1 "hole" PAD-0.53MM#1 44,67 r0 top
J2 "hole" PAD-0.53MM#1 45,66 r0 top
J3 "hole" PAD-0.53MM#1 46,67 r0 top
J4 "hole" PAD-0.53MM#1 47,66 r0 top
J5 "hole" PAD-0.53MM#1 48,67 r0 top
J6 "hole" PAD-0.53MM#1 49,66 r0 top
J7 "hole" PAD-0.53MM#1 50,67 r0 top
J8 "hole" PAD-0.53MM#1 51,66 r0 top
J9 "hole" PAD-0.53MM#1 52,67 r0 top
J10 "hole" PAD-0.53MM#1 53,66 r90 top
J11 "hole" PAD-0.53MM#1 54,67 r0 top
J12 "hole" PAD-0.53MM#1 55,66 r90 top
J13 "hole" PAD-0.53MM#2 35,48 r90 top
J14 "hole" PAD-0.53MM#1 35.905,38.914 r90 top
J15 "hole" PAD-0.53MM#3 37,47.4 r90 top
J16 "hole" HOLE-3.40MM-M3-8MMEYELET 95,5 r0 top locked
J17 "hole" HOLE-3.40MM-M3-8MMEYELET 95,75 r0 top locked
J18 "hole" HOLE-3.40MM-M3-8MMEYELET 5,5 r0 top locked
J19 "hole" HOLE-3.40MM-M3-8MMEYELET 5,75 r0 top locked
J20 "hole" PAD-0.53MM#1 54.9,30 r90 top
J21 "hole" PAD-0.53MM#1 43,30 r180 top
J22 "hole" PAD-0.53MM#1 57.9,16 r90 top
J23 "hole" PAD-0.53MM#4 61.5,78.9 r90 top
L1 "ASPI-4030S-100M-T" INDUCTOR_ASPI-4030S-100M 30,20 r180 top value=10uH
L2 "HFZ 2012PF-181T40" CAPACITOR-0805 55.5,37.9 r0 bottom value=180R@100MHz
L3 "HFZ 2012PF-181T40" CAPACITOR-0805 37,53 r90 bottom value=180R@100MHz
L4 "2506036007Y3" CAPACITOR-0603 68.5,73 r0 top value=60R@100MHz
L5 "HFZ 2012PF-181T40" CAPACITOR-0805 51.5,38.1 r0 bottom value=180R@100MHz
L6 "HFZ 2012PF-181T40" CAPACITOR-0805 37,48.9 r90 bottom value=180R@100MHz
L7 "3404.2419.11" 2-SMD-Fuse 17,40 r90 top
L8 "104CDMCCDS-220MC" "Inductor_22UH 5A" 50,7 r0 top value=22uH
LED1 "B1911USD-20D000114U1930" LED-0603-2PIN 26,21 r180 top
LED2 "B1911USD-20D000114U1930" LED-0603-2PIN 78,18 r180 top
LED3 "B1911USD-20D000114U1930" LED-0603-2PIN 78,16 r180 top
LED4 "B1911USD-20D000114U1930" LED-0603-2PIN 78,33 r180 top
LED5 "B1911USD-20D000114U1930" LED-0603-2PIN 83,77 r90 top
LED6 "B1911USD-20D000114U1930" LED-0603-2PIN 87,77 r90 top
LED7 "B1911USD-20D000114U1930" LED-0603-2PIN 78,31 r180 top
LED8 "B1911USD-20D000114U1930" LED-0603-2PIN 78,49 r180 top
LED9 "B1911USD-20D000114U1930" LED-0603-2PIN 78,47 r180 top
LED10 "B1911USD-20D000114U1930" LED-0603-2PIN 78,62 r180 top
LED11 "B1911USD-20D000114U1930" LED-0603-2PIN 78,64 r180 top
LED12 "B1911USD-20D000114U1930" LED-0603-2PIN 78,13.1 r0 top
LED13 "B1911USD-20D000114U1930" LED-0603-2PIN 78,28.1 r0 top
LED14 "B1911USD-20D000114U1930" LED-0603-2PIN 15.8,76 r270 top
LED15 "B1911USD-20D000114U1930" LED-0603-2PIN 78,44.1 r0 top
LED16 "B1911USD-20D000114U1930" LED-0603-2PIN 78,59.1 r0 top
LED17 "B1911USD-20D000114U1930" LED-0603-2PIN 59,18 r0 top
P1 "F3311A7H121012E200" AMPHENOL_F3311A7H121012E200 34,67 r180 top
P2 "RJ545_Shielded" ADAMTECH_MTJ-88ARX1-FSM-LG 3,61 r270 top
P3 "RJ45 UnShield" AMPHENOL_54602-908LF 5,20 r270 top
P4 "4pos-TH-2.54mm" HDR1X4 19,20 r270 top
P5 "RJ45-4P-Shielded" ETH_A00-432-262-450 84.81,14.6 r90 top locked
P6 "4pos-TH-2.54mm" HDR1X4 7,31 r180 top
P7 "CONN RCPT USB2.0 MICRO B SMD R/A" FCI_10118193-0001LF 50,78 r180 top
P8 "XT30" XT30PW_smd 1,40 r90 top
P9 "4pos-SMD-1.27mm" HDR1X4-SMD-50mils 77,75 r0 top
P10 "3pos-TH-2.54mm" HDR1X3 29,6 r270 top
P11 "F3311A7H121012E200" AMPHENOL_F3311A7H121012E200 34,72.7 r0 bottom
Q1 "AONR21307" DFN8_3x3_Power 23,43 r270 top
Q2 "AONR21307" DFN8_3x3_Power 23,37 r270 top
Q3 "SSM3J332R" SOT-23-3 27,37 r0 top
Q4 "PT61017PEL" SOIC_PT61017PEL 21,60 r180 top
Q5 "PT61017PEL" SOIC_PT61017PEL 73,17 r0 bottom
Q6 "PT61017PEL" SOIC_PT61017PEL 73,32 r0 bottom
Q7 "SSM3J332R" SOT-23-3 89,20 r270 bottom
Q8 "SSM3J332R" SOT-23-3 89,34 r270 bottom
Q9 "DMG3402L-7" SOT-23-3 94,20 r270 bottom
Q10 "DMG3402L-7" SOT-23-3 94,34 r270 bottom
Q11 "SSM3J332R" SOT-23-3 11,71 r90 top
Q12 "DMG3402L-7" SOT-23-3 15,71 r90 top
Q13 "SSM3J332R" SOT-23-3 89,48 r270 bottom
Q14 "SSM3J332R" SOT-23-3 89,59 r270 bottom
Q15 "DMG3402L-7" SOT-23-3 94,48 r270 bottom
Q16 "DMG3402L-7" SOT-23-3 94,59 r270 bottom
Q17 "PT61017PEL" SOIC_PT61017PEL 73,48 r0 bottom
Q18 "PT61017PEL" SOIC_PT61017PEL 73,63 r0 bottom
R1 "SMT resistor" Resistor-0603 27,34 r0 top value=10k
R2 "SMT resistor" Resistor-0603 15.2,56.8 r0 bottom value=75R
R3 "SMT resistor" Resistor-0603 15.2,63.1 r0 bottom value=75R
R4 "SMT resistor" Resistor-0603 26,19.055 r0 top value=1k
R5 "SMT resistor" Resistor-0603 9.9,54.8 r90 bottom value=1k
R6 "SMT resistor" Resistor-0603 28,43 r90 top value=10k
R7 "SMT resistor" Resistor-0603 30,43 r270 top value=10k
R8 "SMT resistor" Resistor-0603 9.8,67 r90 bottom value=1k
R9 "SMT resistor" Resistor-0603 42.2,61.5 r270 top value=10k
R10 "SMT resistor" Resistor-0603 40.7,61.5 r270 top value=10k
R11 "SMT resistor" Resistor-0603 38.4,58.4 r0 top value=10k
R12 "SMT resistor" Resistor-0603 38.4,57 r0 top value=10k
R13 "SMT resistor" Resistor-0603 75,14.5 r0 top value=750R
R14 "SMT resistor" Resistor-0603 75,19.5 r0 top value=750R
R15 "SMT resistor" Resistor-0603 75,29.5 r0 top value=750R
R16 "SMT resistor" Resistor-0603 75,34.5 r0 top value=750R
R17 "SMT resistor" Resistor-0603 75,50.5 r0 top value=750R
R18 "SMT resistor" Resistor-0603 38.4,52.6 r180 top value=191R
R19 "SMT resistor" Resistor-0603 75,65.5 r0 top value=750R
R20 "SMT resistor" Resistor-0603 75,60.5 r0 top value=750R
R21 "SMT resistor" Resistor-0603 13.1,51.5 r180 top value=750R
R22 "SMT resistor" Resistor-0603 38,44 r180 top value=10k
R23 "SMT resistor" Resistor-0603 38,42 r180 bottom value=10k
R24 "SMT resistor" Resistor-0603 38,42 r180 top value=10k
R25 "SMT resistor" Resistor-0402 56.3,37.1 r270 top value=0R
R26 "SMT resistor" Resistor-0603 59.9,40.6 r90 top value=6.04k
R27 "SMT resistor" Resistor-0603 75,18 r180 top value=1k
R28 "SMT resistor" Resistor-0603 75,16 r180 top value=1k
R29 "SMT resistor" Resistor-0603 75,33 r180 top value=1k
R32 "SMT resistor" Resistor-0603 75,31 r180 top value=1k
R33 "SMT resistor" Resistor-0603 78,11 r180 top value=75R
R34 "SMT resistor" Resistor-0603 78,20.5 r180 top value=75R
R35 "SMT resistor" Resistor-0603 78,26 r180 top value=75R
R36 "SMT resistor" Resistor-0603 78,35.5 r180 top value=75R
R37 "SMT resistor" Resistor-0603 75,49 r180 top value=1k
R38 "SMT resistor" Resistor-0603 41.8,70.6 r180 bottom value=10k
R39 "SMT resistor" Resistor-0603 41.6,76.7 r180 bottom value=10k
R40 "SMT resistor" Resistor-0603 83,73 r90 top value=1k
R41 "SMT resistor" Resistor-0603 87,73 r90 top value=1k
R42 "SMT resistor" Resistor-0603 75,47 r180 top value=1k
R43 "SMT resistor" Resistor-0603 75,62 r180 top value=1k
R44 "SMT resistor" Resistor-0603 75,64 r180 top value=1k
R45 "SMT resistor" Resistor-0603 78,42 r180 top value=75R
R46 "SMT resistor" Resistor-0603 78,51.5 r180 top value=75R
R47 "SMT resistor" Resistor-0603 78,57 r180 top value=75R
R48 "SMT resistor" Resistor-0603 78,66.5 r180 top value=75R
R49 "SMT resistor" Resistor-0603 26,13 r180 top value=100k
R50 "SMT resistor" Resistor-0603 26,15 r180 top value=32.4k
R51 "SMT resistor" Resistor-0603 51.8,23.7 r180 top value=10k
R52 "SMT resistor" Resistor-0603 43,18 r180 top value=10k
R53 "SMT resistor" Resistor-0603 55,16 r0 top value=100k
R54 "SMT resistor" Resistor-0603 55,20 r180 top value=8.87k
R55 "SMT resistor" Resistor-0603 93.85,23 r180 bottom value=10k
R56 "SMT resistor" Resistor-0603 93,17 r180 bottom value=10k
R57 "SMT resistor" Resistor-0603 94,37 r180 bottom value=10k
R58 "SMT resistor" Resistor-0603 93,31 r180 bottom value=10k
R59 "SMT resistor" Resistor-0603 89,17 r0 bottom value=10k
R60 "SMT resistor" Resistor-0603 89,31 r0 bottom value=10k
R61 "SMT resistor" Resistor-0603 97,20 r90 bottom value=10k
R62 "SMT resistor" Resistor-0603 97,34 r90 bottom value=10k
R63 "SMT resistor" Resistor-0603 20,71 r90 top value=10k
R64 "SMT resistor" Resistor-0603 13,73.3 r180 top value=10k
R65 "SMT resistor" Resistor-0603 17,76 r90 top value=10k
R66 "SMT resistor" Resistor-0603 18,71 r270 top value=10k
R67 "SMT resistor" Resistor-0603 94,51 r180 bottom value=10k
R68 "SMT resistor" Resistor-0603 93,45 r180 bottom value=10k
R69 "SMT resistor" Resistor-0603 94,62 r180 bottom value=10k
R70 "SMT resistor" Resistor-0603 93,56 r180 bottom value=10k
R71 "SMT resistor" Resistor-0603 89,45 r0 bottom value=10k
R72 "SMT resistor" Resistor-0603 89,56 r0 bottom value=10k
R73 "SMT resistor" Resistor-0603 97,48 r90 bottom value=10k
R74 "SMT resistor" Resistor-0603 97,59 r90 bottom value=10k
R75 "SMT resistor" Resistor-0603 59,20 r180 top value=1k
SW1 "PTS815 SJM 250 SMTR LFS" "SW4_PTS815 SJM 250 SMTR LFS_CNK" 41.7,70 r0 top
SW2 "PTS815 SJM 250 SMTR LFS" "SW4_PTS815 SJM 250 SMTR LFS_CNK" 41.675,75.95 r0 top
T1 "NetTie_0402" NetTie-0402 65.1,67.2 r90 top
T2 "NetTie_0603" NetTie-0603-short 36,57 r90 top
T3 "NetTie_0603_Short" NetTie-0603-short 38,40 r180 top
T4 "NetTie_0402" NetTie-0402 55,71.5 r270 top
T5 "NetTie_0402" NetTie-0402 54,71.5 r270 top
T6 "NetTie_0603_Short" NetTie-0603-short 94,25 r180 bottom
T7 "NetTie_0603_Short" NetTie-0603-short 94,39 r180 bottom
T8 "NetTie_0603_Short" NetTie-0603-short 22,71 r90 top
T9 "NetTie_0603_Short" NetTie-0603-short 94,53 r180 bottom
T10 "NetTie_0603_Short" NetTie-0603-short 94,64 r180 bottom
T* "Jumper-3pos-small" Jumper-3pos-small 12.5,77.2 r0 top
U1 "RT8258GJ6" SOT-23-6 30,15 r270 top
U2 "KSZ8567STXI-TR" TQFP128_EP_6XX_MCH-M 50,50.4 r180 top
U3 "TLV75725PDBVR" SOT-23-5 51.8,26.7 r270 top
U4 "TLV1117LV12DCYR" SOT-223-3/TO-261-3S 40,23.8 r0 top
U5 "RT6285GSP" SOIC-8-EXPOSED-PAD 49,16 r90 top
U6 "SN65HVD232DR" SOIC-8 18,6 r90 top
U7 "ESP32-S3FN8-SOC" "VFQFN-56 Exposed Pad" 62,74 r180 top
X1 "CX2016DB40000D0FLJCC" 4-SMD 62,66.5 r90 top
X2 "FL2500123Z" 4-SMD 57.5,37.6 r0 top

## Footprints (in the part's own frame and the unit in brackets; to place one, negate y for a bottom-side part, rotate by r counter-clockwise, add the part's x,y. Pads: shape width x height; smd on the part's side, far side on the other; paste and mask are expansions set on the pad)
2-SMD-Fuse [mm]
  rect 3x5 smd: 1(-4.2,0) 2(4.2,0)
  silkscreen extent -6,-2.8 6,2.8, body extent -5.6,-2.09 5.7,2.11, height 4.02
4-SMD [mm]
  rect 0.9x0.8 smd: 1(0,-1.1) 2(1.4,-1.1) 3(1.4,0) 4(0,0)
  silkscreen extent -0.87,-1.6 2,0.5
ADAMTECH_MTJ-88ARX1-FSM-LG [mm] "ethernet"
  rect 1.408x1.408 hole 0.9: 1(3.57,2.54)
  round 1.408 hole 0.9: 2(2.55,4.32) 3(1.53,2.54) 4(0.51,4.32) 5(-0.51,2.54) 6(-1.53,4.32) 7(-2.55,2.54) 8(-3.57,4.32) 9(6.86,9.14) 10(4.57,9.14) 11(-4.57,9.14) 12(-6.86,9.14)
  round 2.4 hole 1.6: SH1(-8.125,3.43) SH2(8.125,3.43)
  round 3.2 hole 3.2 unplated: ""(-6.35,0) ""(6.35,0)
  silkscreen extent -8.25,-5.46 8.25,10.29, body extent -8.4,-5.66 8.4,10.49, height 13.21
AMPHENOL_54602-908LF [mm] "RJ45"
  rect 1.268x1.268 / inner round 1.268 / far side rect 1.268x1.268 hole 0.76: 1(-4.445,6.35)
  round 1.268 hole 0.76: 2(-3.175,8.89) 3(-1.905,6.35) 4(-0.635,8.89) 5(0.635,6.35) 6(1.905,8.89) 7(3.175,6.35) 8(4.445,8.89)
  round 3.2 hole 3.2 unplated: ""(-5.715,0) ""(5.715,0)
  silkscreen extent -7.65,-7.62 7.65,10.12, body extent -7.65,-7.62 7.65,10.12, height 12.7
AMPHENOL_F3311A7H121012E200 [mm] "FFC connector 12pos"
  rect 0.3x0.8 smd: 1(-2.75,1.22) 2(-2.25,1.22) 3(-1.75,1.22) 4(-1.25,1.22) 5(-0.75,1.22) 6(-0.25,1.22) 7(0.25,1.22) 8(0.75,1.22) 9(1.25,1.22) 10(1.75,1.22) 11(2.25,1.22) 12(2.75,1.22)
  rect 0.4x0.8 smd: SH1(-3.75,-1.28) SH2(3.75,-1.28)
  silkscreen extent -4.85,-1.9 4,1.9, body extent -4,-1.9 4,1.4, height 1.62
CAP_J-V_8X10P5_RUB [mil]
  rect 130x59 smd paste+0: 1(-130,0) 2(130,0)
  silkscreen extent -225,-173 173,173, body extent -175,-167 175,167, height 415
CAPACITOR-0402 [mm] "Metric 1005, EIA 0402. Per Yageo Product Specification V2.6"
  rrect15% 0.5x0.6 smd: 1(-0.5,0) 2(0.5,0)
  Top Layer pour cut-out: -0.3,0.25 0.3,0.25 0.3,-0.25 -0.3,-0.25
  silkscreen extent -0.05,-0.3 0.05,0.3, body extent -0.5,-0.27 0.5,0.28, height 0.51
CAPACITOR-0603 [mm] "Metric 1608, EIA 0603. Per Yageo Product Specification V2.2"
  rrect15% 0.9x0.8 smd: 1(-0.85,0) 2(0.85,0)
  Top Layer pour cut-out: -0.2,0.2 0.2,0.2 0.2,-0.2 -0.2,-0.2
  silkscreen extent -0.15,-0.3 0.15,0.3, body extent -0.93,-0.41 0.93,0.41, height 0.81
CAPACITOR-0805 [mm] "Metric 2012, EIA 0805, Per Yageo Product Specification V2.2"
  rrect15% 0.9x1.4 smd: 1(-1.05,0) 2(1.05,0)
  silkscreen extent -0.3,-0.7 0.3,0.7, body extent -1.09,-0.64 1.09,0.64, height 1.26
CAPACITOR-1206 [mm] "Metric 3216, EIA 1206, Per Yageo Product Specification V2.2"
  rrect10% 1x1.8 smd: 1(-1.5,0) 2(1.5,0)
  silkscreen extent -0.67,-0.72 0.67,0.72, body extent -1.75,-0.81 1.75,0.81, height 1.61
DFN8_3x3_Power [mm]
  rect 0.8x0.42 smd paste+0 mask+0: 1(-1.549,0.975) 2(-1.549,0.325) 3(-1.549,-0.325) 4(-1.549,-0.975)
  rect 0.813x0.42 smd paste+0 mask+0: 5(1.549,-0.975) 6(1.549,-0.325) 7(1.549,0.325) 8(1.549,0.975)
  Top Layer region: -0.686,-1.219 -0.686,1.219 1.182,1.219 1.182,-1.219
  silkscreen extent -1.68,-1.68 1.68,1.68, body extent -1.58,-1.58 1.58,1.58, height 0.75
Diode-0402 [mm] "Metric 1005, EIA 0402. Per Yageo Product Specification V2.6"
  rrect25% 0.5x0.5 smd: 1(-0.5,0) 2(0.5,0)
  Top Layer pour cut-out: -0.3,0.25 0.3,0.25 0.3,-0.25 -0.3,-0.25
  silkscreen extent -0.9,-0.26 -0.9,0.25, body extent -0.5,-0.27 0.5,0.28, height 0.51
DO-219AD [mil]
  rect 73x37 smd paste+0 mask+0: 1(-38.5,0)
  rect 52x32 smd paste+0 mask+0: 2(49,0)
  silkscreen extent -83,-24 -83,24, body extent -53,-27 53,27, height 29
ETH_A00-432-262-450 [mil] "CONN MOD JACK 8P8C R/A SHIELDED"
  round 126 / inner round 60 / far side round 126 hole 126 unplated paste-99999 mask-63: 36(-50,-250) 37(2050,-250)
  round 55 / inner round 60 / far side round 55 hole 35 paste-99999 mask+0: A1(0,0) A2(50,100) A3(100,0) A4(150,100) A5(200,0) A6(250,100) A7(300,0) A8(350,100) B1(550,0) B2(600,100) B3(650,0) B4(700,100) B5(750,0) B6(800,100) B7(850,0) B8(900,100) C1(1100,0) C2(1150,100) C3(1200,0) C4(1250,100) C5(1300,0) C6(1350,100) C7(1400,0) C8(1450,100) D1(1650,0) D2(1700,100) D3(1750,0) D4(1800,100) D5(1850,0) D6(1900,100) D7(1950,0) D8(2000,100)
  round 98.43 hole 63 paste-99999 mask-31.5: Shield(-159,-395) Shield(450,150) Shield(1000,150) Shield(1550,150) Shield(2159,-395)
  silkscreen extent -265,-690 2173,169, body extent -163,-673 2163,164, height 539
FCI_10118193-0001LF [mm]
  rect 0.4x1.35 smd: 1(-1.3,2.675) 2(-0.65,2.675) 3(0,2.675) 4(0.65,2.675) 5(1.3,2.675)
  rect 1.6x1.4 smd: S1(-3.2,2.45) S2(3.2,2.45)
  rect 1.9x1.9 smd: S3(1.2,0) S4(-1.2,0)
  oval 0.9x1.8 hole 0.5 slot 1.2 at 90 deg: S5(-3.3,0) S6(3.3,0)
  silkscreen extent -3.8,-1.45 3.8,3.6, body extent -3.93,-2.76 3.93,2.95, height 2.85
HDR1X3 [mm] "Connector; Header; 2 Position"
  rect 1.5x1.5 hole 1: 1(-2.54,0)
  round 1.5 hole 1: 2(0,0) 3(2.54,0)
  silkscreen extent -3.8,-1.3 3.8,1.3, body extent -3.81,-1.27 3.81,1.27, height 8.54
HDR1X4 [mm] "Connector; Header; 2 Position"
  rect 1.5x1.5 hole 1: 1(-3.81,0)
  round 1.5 hole 1: 2(-1.27,0) 3(1.27,0) 4(3.81,0)
  silkscreen extent -5.1,-1.3 5.1,1.2, body extent -5.08,-1.27 5.08,1.27, height 8.54
HDR1X4-SMD-50mils [mm] "Connector; Header; 4 Positions 50mils"
  rect 0.8x1.5 smd: 1(-1.905,0)
  oval 0.8x1.5 smd: 2(-0.635,0) 3(0.635,0) 4(1.905,0)
  silkscreen extent -2.6,-1.1 2.6,1.1
HOLE-3.40MM-M3-8MMEYELET [mm] "Hole 3.40mm with round pad for eyelet"
  round 8 hole 3.4: 1(0,0)
"Inductor_22UH 5A" [mm]
  rect 4.1x4.1 smd: 1(-4.75,0) 2(4.75,0)
  silkscreen extent -6,-5 6,5, body extent -5,-5 5,5, height 3.8
INDUCTOR_ASPI-4030S-100M [mm]
  rect 1.1x3.4 smd: 1(-1.5,0) 2(1.5,0)
  silkscreen extent -0.64,-2 0.64,2, body extent -2,-2 2,2, height 3
Jumper-3pos-small [mm] "3 pos selection"
  rect 0.9x1 smd paste-1 mask+0.102: 1(-1.7,0) 2(1.7,0)
  rect 0.5x1 smd paste-1 mask+0.102: 3(0,0)
  Top Layer region: -1.35,0.5 -1.125,0.5 -1,0.3 -0.8,0 -1,-0.3 -1.125,-0.5 -1.35,-0.5
  Top Layer region: 0,0.5 -0.75,0.5 -0.625,0.3 -0.425,0 -0.625,-0.3 -0.75,-0.5 0,-0.5
  Top Layer region: 1.35,0.5 1.125,0.5 1,0.3 0.8,0 1,-0.3 1.125,-0.5 1.35,-0.5
  Top Layer region: 0,0.5 0.75,0.5 0.625,0.3 0.425,0 0.625,-0.3 0.75,-0.5 0,-0.5
  silkscreen extent -2.3,-0.7 2.3,0.7
LED-0603-2PIN [mm] "Metric 1608, EIA 0603. Per Yageo Product Specification V2.2"
  rrect15% 0.8x0.9 smd: 1(-0.75,0) 2(0.75,0)
  Top Layer pour cut-out: -0.35,0.45 0.35,0.45 0.35,-0.45 -0.35,-0.45
  silkscreen extent -1.28,-0.41 0,0.41, body extent -0.8,-0.4 0.8,0.4, height 0.8
NetTie-0402 [mm] "Metric 1005, EIA 0402 Drawn per Yageo \"Chip resistors Mounting\" rev 10"
  rrect15% 0.5x0.6 smd: 1(-0.5,0) 2(0.5,0)
  Top Layer region: -0.375,0.3 -0.225,0.3 -0.025,0 -0.225,-0.3 -0.375,-0.3
  Top Layer region: 0.475,0.3 0.05,0.3 0.25,0 0.05,-0.3 0.375,-0.3 0.475,-0.3
  body extent -0.51,-0.25 0.51,0.25, height 0.51
NetTie-0603-short [mm] "Net Tie with an EIA 0603 land pattern"
  rect 0.9x1 smd paste-1 mask+0.102: 1(-0.85,0) 2(0.85,0)
  Top Layer region: 0.5,0.5 0.275,0.5 0.15,0.3 -0.05,0 0.15,-0.3 0.275,-0.5 0.5,-0.5
  Top Layer region: -0.5,0.5 0,0.5 -0.125,0.3 -0.325,0 -0.125,-0.3 0,-0.5 -0.5,-0.5
PAD-0.53MM#1 [mm] "Hole 0.53mm"
  round 1.2 smd paste-2539.97: 1(0,0)
PAD-0.53MM#2 [mm] "Hole 0.53mm"
  oval 0.6x1.2 smd paste+0: 1(-2.3,-2)
PAD-0.53MM#3 [mm] "Hole 0.53mm"
  oval 0.6x1.2 smd paste-2539.97: 1(0,0)
PAD-0.53MM#4 [mm] "Hole 0.53mm"
  oval 1x0.8 smd paste-2539.97: 1(0,0)
Resistor-0402 [mm] "Metric 1005, EIA 0402 Drawn per Yageo \"Chip resistors Mounting\" rev 10"
  rrect15% 0.5x0.6 smd: 1(-0.5,0) 2(0.5,0)
  Top Layer pour cut-out: -0.25,0.3 0.25,0.3 0.25,-0.3 -0.25,-0.3
  silkscreen extent -0.05,-0.3 0.05,0.3, body extent -0.51,-0.25 0.51,0.25, height 0.51
Resistor-0603 [mm] "Metric 1608, EIA 0603 Drawn per Yageo \"Chip resistors Mounting\" rev 10"
  rrect15% 0.9x0.8 smd: 1(-0.85,0) 2(0.85,0)
  Top Layer pour cut-out: -0.2,0.2 0.2,0.2 0.2,-0.2 -0.2,-0.2
  Top Layer keep-out region: -0.2,-0.2 0.2,-0.2 0.2,0.2 -0.2,0.2
  silkscreen extent -0.15,-0.3 0.15,0.3, body extent -0.8,-0.4 0.8,0.4, height 0.55
SMA/DO-214AC [mm] "SMA, DO-214AC. From Diode DS19005 rev 16-2"
  rect 2.5x1.7 smd: 1(-2,0) 2(2,0)
  silkscreen extent -2.3,-1.46 2.3,1.46, body extent -2.55,-1.33 2.55,1.33, height 2.08
SOD-123 [mm] "SOD-123. From Diodes DDZ6V2B-7 datasheet"
  rect 0.9x0.95 smd: 1(-1.575,0) 2(1.575,0)
  silkscreen extent -0.5,-0.7 0.5,0.7, body extent -1.85,-0.8 1.85,0.8, height 1.27
SOD-123F [mm] "SOD-123F from https://www.diodes.com/assets/Package-Files/SOD123F.pdf on 2017-03-16"
  rrect10% 1.34x1.8 smd: 1(-1.43,0) 2(1.43,0)
  silkscreen extent -0.5,-0.85 0.5,0.85, body extent -1.85,-0.85 1.9,0.85, height 1.22
SOIC-8 [mil] "8-Lead Plastic Small Outline, 0.15in pitch,  LTC DWG # 05-08-1610 Rev G"
  rrect25% 21x78 smd: 1(-75,-97) 2(-25,-97) 3(25,-97) 4(75,-97) 5(75,97) 6(25,97) 7(-25,97) 8(-75,97)
  silkscreen extent -98,-118 98,60, body extent -98,-122 98,122, height 69
SOIC-8-EXPOSED-PAD [mm] "8-Lead Plastic Small Outline, 0.15in pitch,  LTC DWG # 05-08-1610 Rev G"
  rrect25% 0.533x1.5 smd: 1(-1.905,-2.7) 2(-0.635,-2.7) 3(0.635,-2.7) 4(1.905,-2.7) 5(1.905,2.7) 6(0.635,2.7) 7(-0.635,2.7) 8(-1.905,2.7)
  rect 3.2x2.4 smd: 9(0,0)
  silkscreen extent -2.49,-3 2.49,1.52, body extent -2.5,-3.1 2.5,3.1, height 1.75
SOIC_PT61017PEL [mil]
  rect 67x30 smd paste+0: 1(-173.5,175) 2(-173.5,125) 3(-173.5,75) 4(-173.5,25) 5(-173.5,-25) 6(-173.5,-75) 7(-173.5,-125) 8(-173.5,-175) 9(173.5,-175) 10(173.5,-125) 11(173.5,-75) 12(173.5,-25) 13(173.5,25) 14(173.5,75) 15(173.5,125) 16(173.5,175)
  silkscreen extent -181,-257 141,257, body extent -183,-252 183,252, height 222
SOT-23-3 [mm] "SOT23-3, from TI DBZ (R-PDSO-G3)"
  rrect15% 0.6x1.05 smd: 1(-0.95,-1.185) 2(0.95,-1.185) 3(0,1.185)
  Top Layer keep-out region: -0.8,-0.5 0.8,-0.5 0.8,0.5 -0.8,0.5
  silkscreen extent -1.4,-0.4 1.4,0.4, body extent -1.45,-1.21 1.45,1.21, height 0.98
SOT-23-5 [mm] "SOT23-5, from TI DDC (R-PDSO-G6), modified from 6 to 5 pins"
  rrect15% 0.6x1.1 smd: 1(-0.95,-1.35) 2(0,-1.35) 3(0.95,-1.35) 4(0.95,1.35) 5(-0.95,1.35)
  silkscreen extent -1.4,-0.4 1.4,0.4, body extent -1.5,-1.5 1.5,1.5, height 1.3
SOT-23-6 [mm] "SOT23-6, from TI DDC (R-PDSO-G6)"
  rrect15% 0.6x1.1 smd: 1(-0.95,-1.35) 2(0,-1.35) 3(0.95,-1.35) 4(0.95,1.35) 5(0,1.35) 6(-0.95,1.35)
  silkscreen extent -1.4,-0.4 1.4,0.4, body extent -1.5,-1.37 1.5,1.38, height 1.1
SOT-223-3/TO-261-3S [mm] "TO-261-3 / SOT-223-3 from Infineon IPN80R600P7 Datasheet, rev 2,1"
  rrect25% 1.5x2 smd: 1(-2.3,0) 2(0,0) 3(2.3,0)
  rrect5% 3.8x2 smd: 4(0,6.2)
  silkscreen extent -3.25,1.4 3.25,4.78, body extent -3.25,-0.37 3.25,6.57, height 1.64
"SW4_PTS815 SJM 250 SMTR LFS_CNK" [mm]
  rect 0.711x0.991 smd paste+0: 1(1.075,2.25) 2(1.075,-2.25) 3(-1.075,2.25) 4(-1.075,-2.25)
  silkscreen extent -1.8,-2.35 1.8,2.32, body extent -1.83,-2.32 1.83,2.32, height 3
TQFP128_EP_6XX_MCH-M [mil]
  rect 61.5x9 smd paste+0 mask+0: 1(-306.25,244.09) 2(-306.25,228.35) 3(-306.25,212.6) 4(-306.25,196.85) 5(-306.25,181.1) 6(-306.25,165.35) 7(-306.25,149.61) 8(-306.25,133.86) 9(-306.25,118.11) 10(-306.25,102.36) 11(-306.25,86.61) 12(-306.25,70.87) 13(-306.25,55.12) 14(-306.25,39.37) 15(-306.25,23.62) 16(-306.25,7.87) 17(-306.25,-7.87) 18(-306.25,-23.62) 19(-306.25,-39.37) 20(-306.25,-55.12) 21(-306.25,-70.87) 22(-306.25,-86.61) 23(-306.25,-102.36) 24(-306.25,-118.11) 25(-306.25,-133.86) 26(-306.25,-149.61) 27(-306.25,-165.35) 28(-306.25,-181.1) 29(-306.25,-196.85) 30(-306.25,-212.6) 31(-306.25,-228.35) 32(-306.25,-244.09) 65(306.25,-244.09) 66(306.25,-228.35) 67(306.25,-212.6) 68(306.25,-196.85) 69(306.25,-181.1) 70(306.25,-165.35) 71(306.25,-149.61) 72(306.25,-133.86) 73(306.25,-118.11) 74(306.25,-102.36) 75(306.25,-86.61) 76(306.25,-70.87) 77(306.25,-55.12) 78(306.25,-39.37) 79(306.25,-23.62) 80(306.25,-7.87) 81(306.25,7.87) 82(306.25,23.62) 83(306.25,39.37) 84(306.25,55.12) 85(306.25,70.87) 86(306.25,86.61) 87(306.25,102.36) 88(306.25,118.11) 89(306.25,133.86) 90(306.25,149.61) 91(306.25,165.35) 92(306.25,181.1) 93(306.25,196.85) 94(306.25,212.6) 95(306.25,228.35) 96(306.25,244.09)
  rect 9x61.5 smd paste+0 mask+0: 33(-244.09,-306.25) 34(-228.35,-306.25) 35(-212.6,-306.25) 36(-196.85,-306.25) 37(-181.1,-306.25) 38(-165.35,-306.25) 39(-149.61,-306.25) 40(-133.86,-306.25) 41(-118.11,-306.25) 42(-102.36,-306.25) 43(-86.61,-306.25) 44(-70.87,-306.25) 45(-55.12,-306.25) 46(-39.37,-306.25) 47(-23.62,-306.25) 48(-7.87,-306.25) 49(7.87,-306.25) 50(23.62,-306.25) 51(39.37,-306.25) 52(55.12,-306.25) 53(70.87,-306.25) 54(86.61,-306.25) 55(102.36,-306.25) 56(118.11,-306.25) 57(133.86,-306.25) 58(149.61,-306.25) 59(165.35,-306.25) 60(181.1,-306.25) 61(196.85,-306.25) 62(212.6,-306.25) 63(228.35,-306.25) 64(244.09,-306.25) 97(244.09,306.25) 98(228.35,306.25) 99(212.6,306.25) 100(196.85,306.25) 101(181.1,306.25) 102(165.35,306.25) 103(149.61,306.25) 104(133.86,306.25) 105(118.11,306.25) 106(102.36,306.25) 107(86.61,306.25) 108(70.87,306.25) 109(55.12,306.25) 110(39.37,306.25) 111(23.62,306.25) 112(7.87,306.25) 113(-7.87,306.25) 114(-23.62,306.25) 115(-39.37,306.25) 116(-55.12,306.25) 117(-70.87,306.25) 118(-86.61,306.25) 119(-102.36,306.25) 120(-118.11,306.25) 121(-133.86,306.25) 122(-149.61,306.25) 123(-165.35,306.25) 124(-181.1,306.25) 125(-196.85,306.25) 126(-212.6,306.25) 127(-228.35,306.25) 128(-244.09,306.25)
  rect 400x400 smd paste-199.5 mask+0: EPAD(0,0)
  silkscreen extent -315,-281 281,281, body extent -315,-315 315,315, height 47
"VFQFN-56 Exposed Pad" [mm] "56-QFN (7x7) ESP32S3"
  rrect25% 0.81x0.22 smd: 1(-3.445,2.6) 2(-3.445,2.2) 3(-3.445,1.8) 4(-3.445,1.4) 5(-3.445,1) 6(-3.445,0.6) 7(-3.445,0.2) 8(-3.445,-0.2) 9(-3.445,-0.6) 10(-3.445,-1) 11(-3.445,-1.4) 12(-3.445,-1.8) 13(-3.445,-2.2) 14(-3.445,-2.6) 29(3.445,-2.6) 30(3.445,-2.2) 31(3.445,-1.8) 32(3.445,-1.4) 33(3.445,-1) 34(3.445,-0.6) 35(3.445,-0.2) 36(3.445,0.2) 37(3.445,0.6) 38(3.445,1) 39(3.445,1.4) 40(3.445,1.8) 41(3.445,2.2) 42(3.445,2.6)
  rrect25% 0.22x0.81 smd: 15(-2.6,-3.445) 16(-2.2,-3.445) 17(-1.8,-3.445) 18(-1.4,-3.445) 19(-1,-3.445) 20(-0.6,-3.445) 21(-0.2,-3.445) 22(0.2,-3.445) 23(0.6,-3.445) 24(1,-3.445) 25(1.4,-3.445) 26(1.8,-3.445) 27(2.2,-3.445) 28(2.6,-3.445) 43(2.6,3.445) 44(2.2,3.445) 45(1.8,3.445) 46(1.4,3.445) 47(1,3.445) 48(0.6,3.445) 49(0.2,3.445) 50(-0.2,3.445) 51(-0.6,3.445) 52(-1,3.445) 53(-1.4,3.445) 54(-1.8,3.445) 55(-2.2,3.445) 56(-2.6,3.445)
  rect 4x4 smd paste-3: 57(0,0)
  silkscreen extent -4.55,-3.5 3.5,3.5, body extent -3.5,-3.5 3.5,3.5, height 0.9
XT30PW_smd [mm]
  round 2.55 hole 1.7: N(2.5,-10)
  rect 2.55x2.55 / inner round 2.55 / far side rect 2.55x2.55 hole 1.7: P(-2.5,-10)
  round 1.508 hole 1: S1(5.5,0) S2(-5.5,0)
  silkscreen extent -6.65,-12.75 6.65,2.95, body extent -6.65,-11 6.65,2.95, height 5